# Allegro board hme-h1d03c144_evb.brd
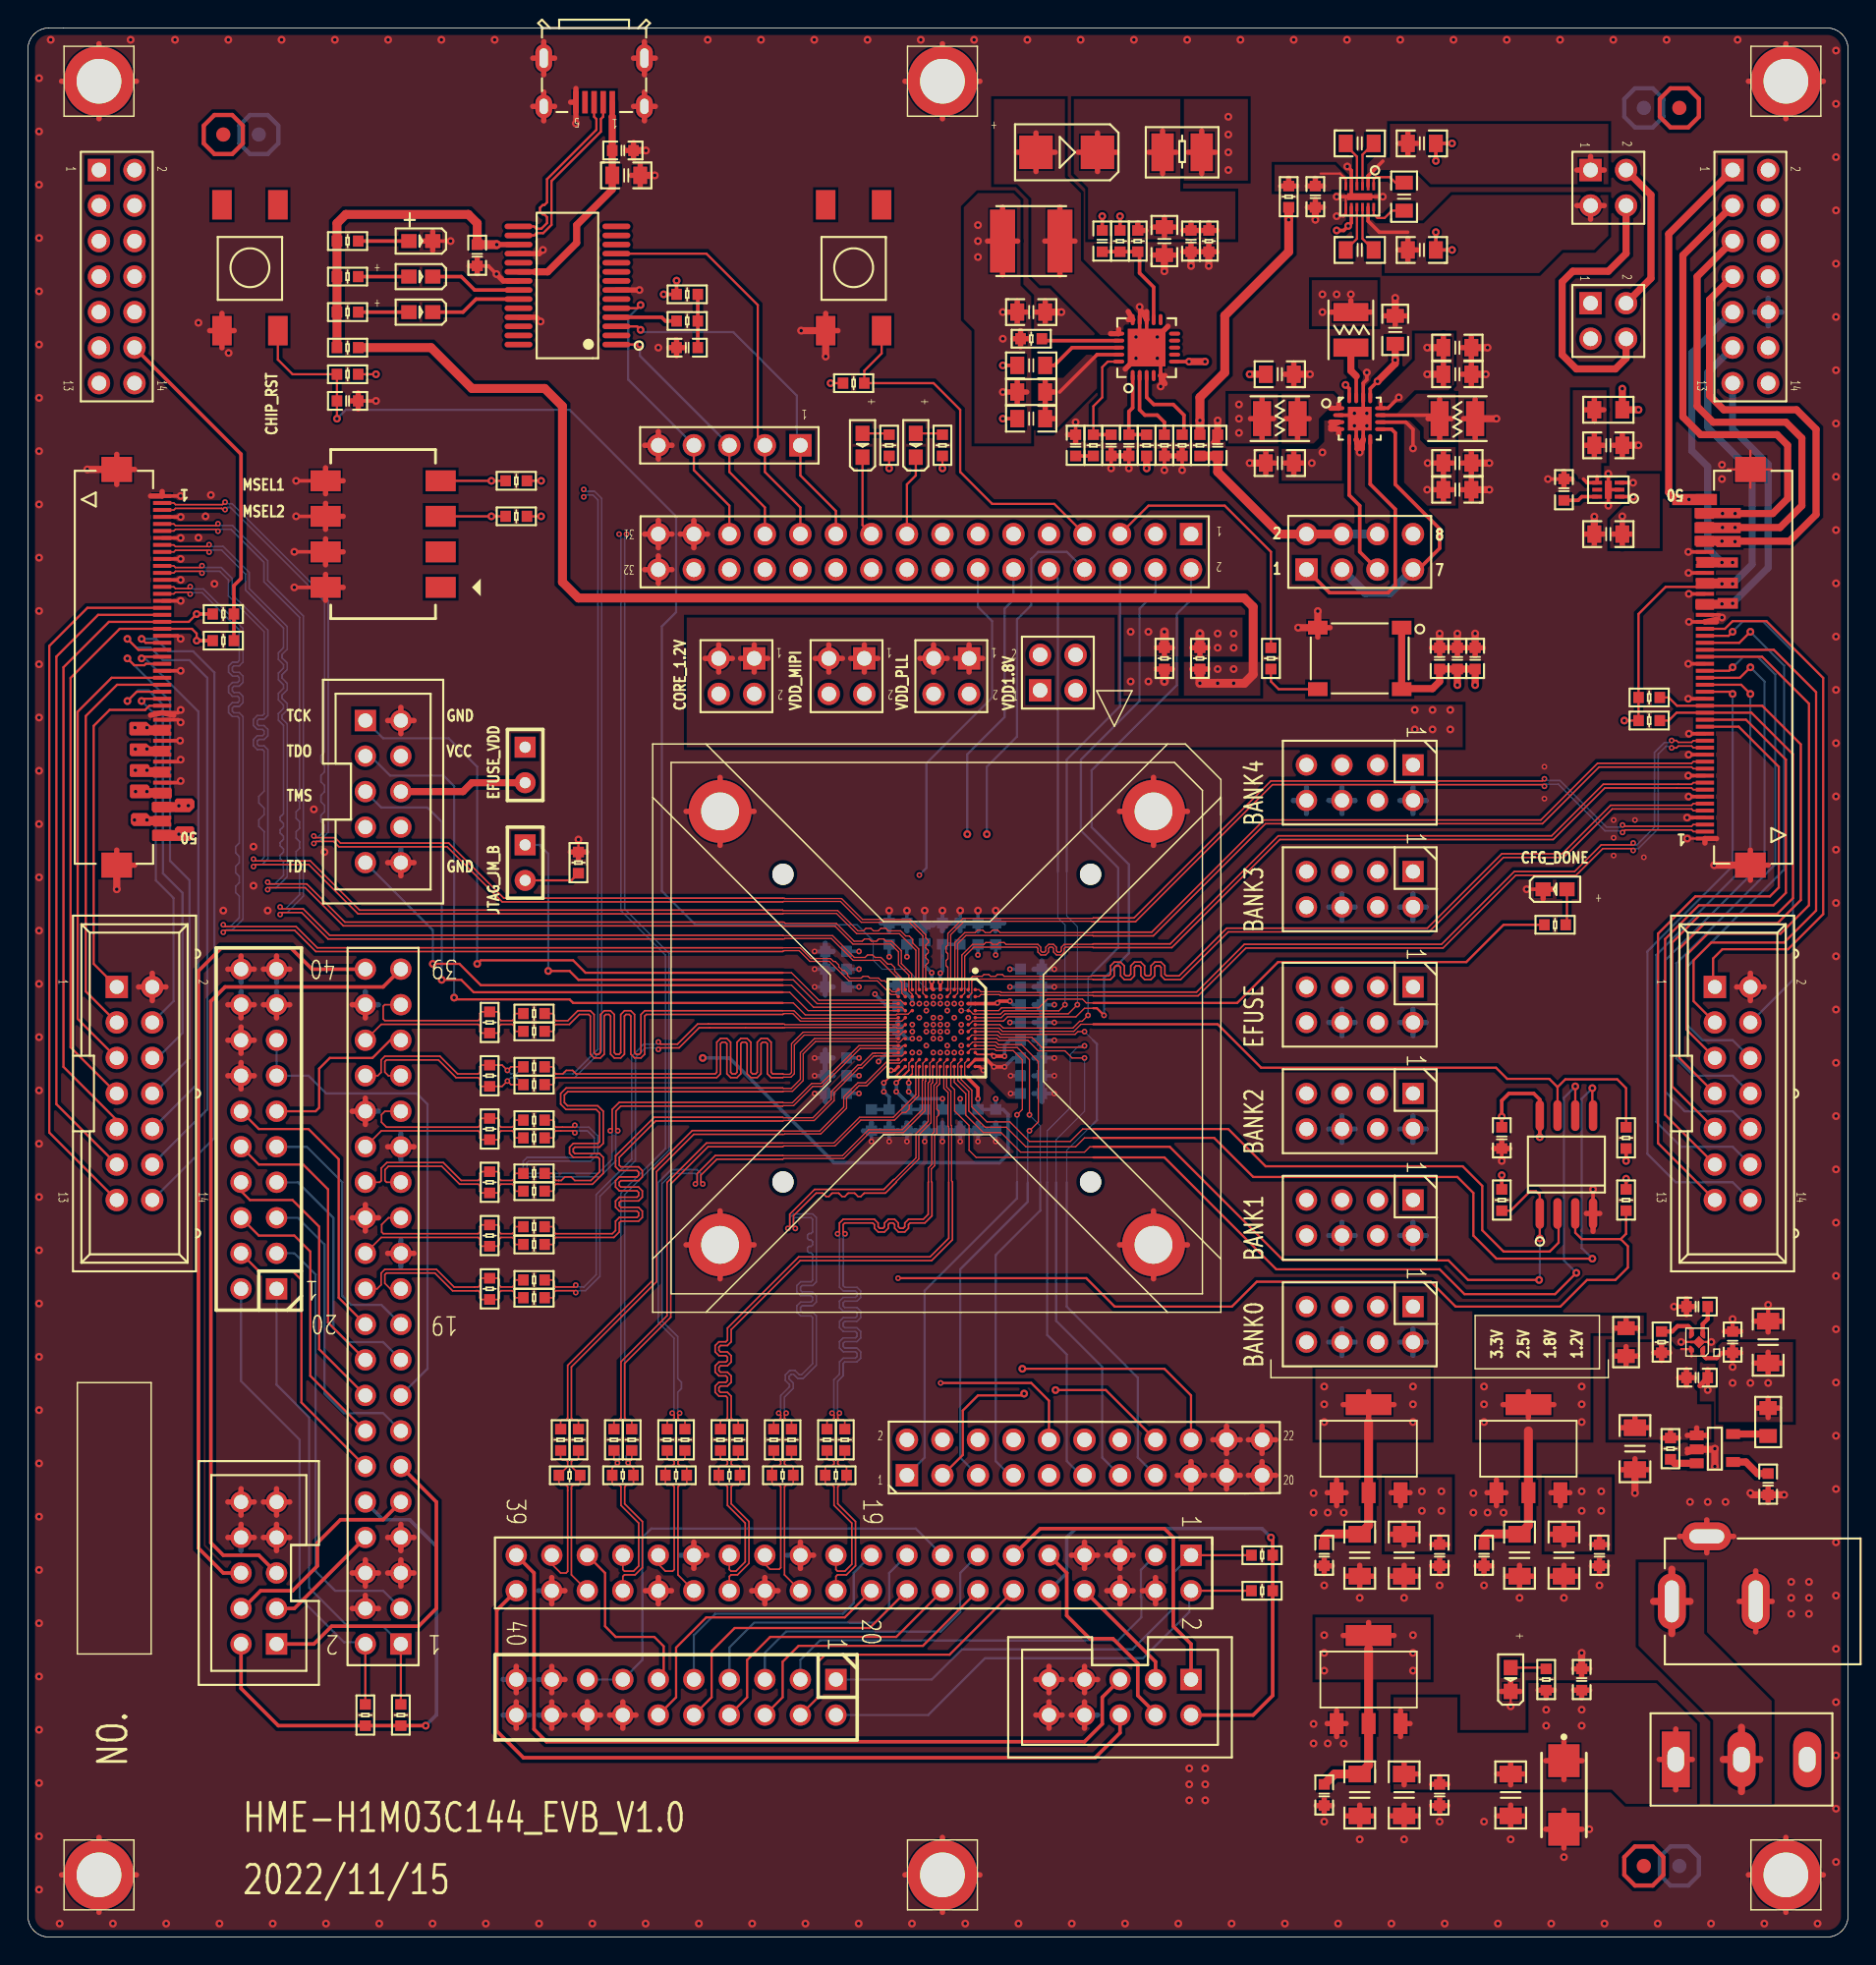
[diagram p0: board, top side]
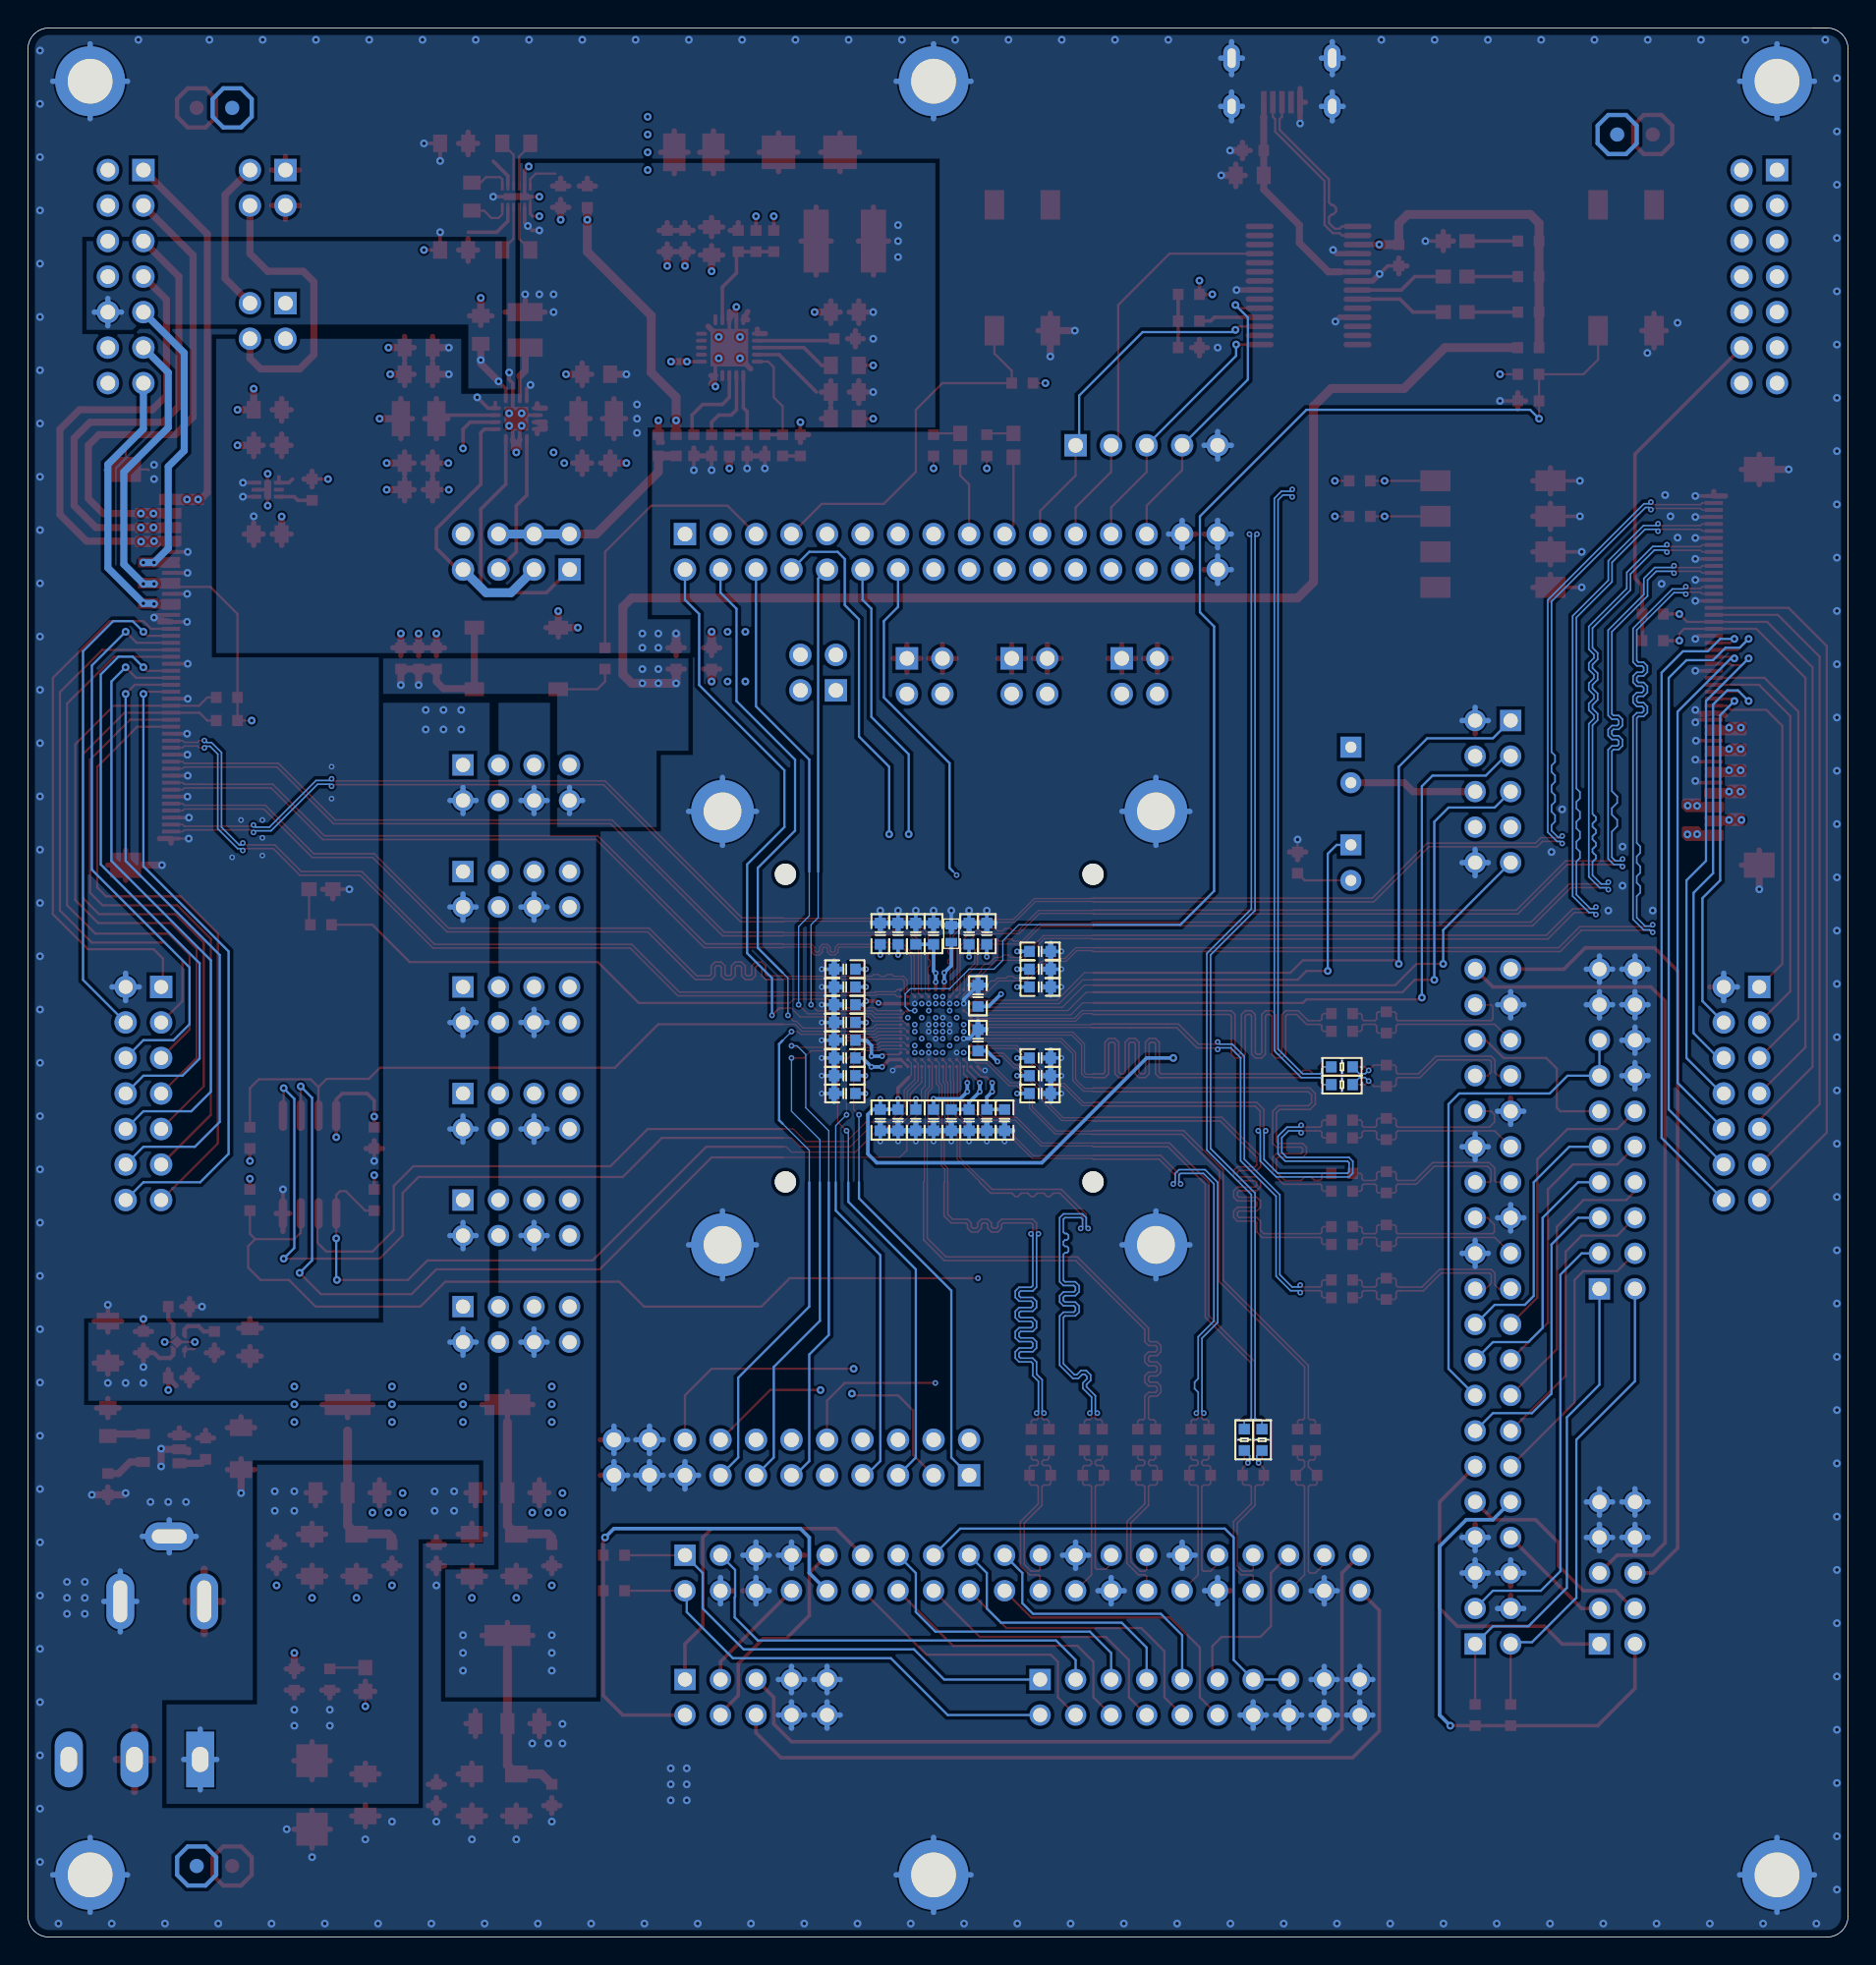
[diagram p1: board, bottom side, seen from below]

Outline 130.18 x 136.53 mm; copper layers: TOP, GND02, ART03, ART04, GND05, BOTTOM. Coordinates in mm from the lower left corner of the outline.
Outline path: 0,135.03 arc(0.44,136.09) 1.5,136.53 ; 0,135.02 arc(0.44,136.09) 1.5,136.53 ; 0,135.02 0,1.5 ; 0,135.03 0,1.5 ; 1.5,136.53 128.68,136.53 arc(129.74,136.09) 130.18,135.03 ; 1.5,136.53 2.54,136.53 ; 1.5,136.53 2.54,136.53 ; 0,1.5 arc(0.44,0.44) 1.5,0 ; 0,1.5 arc(0.44,0.44) 1.5,0 ; 1.5,0 128.67,0 arc(129.74,0.44) 130.18,1.5 ; 1.5,0 128.68,0 arc(129.74,0.44) 130.18,1.5 ; 2.54,136.53 128.67,136.53 arc(129.74,136.09) 130.18,135.02 ; 130.18,135.03 130.18,1.5 ; 130.18,135.02 130.18,1.5

## Design rules (mm)
net group @\HME-H1D03MG144_EVB\.SCHEMATIC1(SCH_1):MIPI_RX0_LP: nets MIPI_RX0_LPN MIPI_RX0_LPP
net group @\HME-H1D03MG144_EVB\.SCHEMATIC1(SCH_1):MIPI_RX1_LP: nets MIPI_RX1_LPN MIPI_RX1_LPP
net group IO15_CFDONE_4: nets IO15_CFDONE_4 N167773310
net group IO18_CLK1: nets IO18_CLK1 N3324689
net group LVDS_01N: nets LVDS_01N LVDS_01N_C
net group LVDS_01P: nets LVDS_01P LVDS_01P_C
net group LVDS_02N: nets LVDS_02N LVDS_02N_C
net group LVDS_02P: nets LVDS_02P LVDS_02P_C
net group LVDS_03N: nets LVDS_03N LVDS_03N_C
net group LVDS_03P: nets LVDS_03P LVDS_03P_C
net group LVDS_04N: nets LVDS_04N LVDS_04N_C
net group LVDS_04P: nets LVDS_04P LVDS_04P_C
net group LVDS_05N: nets LVDS_05N LVDS_05N_C
net group LVDS_05P: nets LVDS_05P LVDS_05P_C
net group LVDS_06N: nets LVDS_06N LVDS_06N_C
net group LVDS_06P: nets LVDS_06P LVDS_06P_C
net group LVDS_07N: nets LVDS_07N LVDS_07N_C
net group LVDS_07P: nets LVDS_07P LVDS_07P_C
net group LVDS_08N: nets LVDS_08N LVDS_08N_C
net group LVDS_08P: nets LVDS_08P LVDS_08P_C
net group LVDS_09N: nets LVDS_09N LVDS_09N_C
net group LVDS_09P: nets LVDS_09P LVDS_09P_C
net group LVDS_10N: nets LVDS_10N LVDS_10N_C
net group LVDS_10P: nets LVDS_10P LVDS_10P_C
net group LVDS_11N: nets LVDS_11N LVDS_11N_C
net group LVDS_11P: nets LVDS_11P LVDS_11P_C
net group LVDS_12N: nets LVDS_12N LVDS_12N_C
net group LVDS_12P: nets LVDS_12P LVDS_12P_C
net group N16733042: nets N16733042 N16733092
net group N16733096: nets N16733096 N16733100
net group N16733108: nets N16733108 N16733112
net group N16733522: nets N16733522 N16733562
net group N16733598: nets N16733598 N16733678
net group USB_DP: nets USB_DM USB_DP
net group VCC5_0: nets N167830511 VCC5_0
net group VCI: nets N16733974 VCI
net group VDDIO_12V: nets N16726004 VDDIO_12V
net group CMOS_SCL_3: nets CMOS_SCL_3 CMOS_SDA_3 LCD_IOVCC_3
net group CMOS_SCL_4: nets CMOS_SCL_4 CMOS_SDA_4 LCD_IOVCC_4
net group CRST_N: nets CRST_N MSEL0 MSEL1 N16775386 N167788470 N167788810 USER_SW0 VDDIO_AUX VDDIO_BANK4
net group FLS_CS#: nets FLS_CS# FLS_HOLD FLS_WP
net group IN_TP_SCL: nets IN_TP_SCL IN_TP_SDA IOVCC_IN
net group IOVCC_OUT: nets IOVCC_OUT OUT_TP_SCL OUT_TP_SDA
net group MIPI-IN: nets MIPIIN_CKN MIPIIN_CKP MIPIIN_D0N MIPIIN_D0P MIPIIN_D1N MIPIIN_D1P MIPIIN_D2N MIPIIN_D2P MIPIIN_D3N MIPIIN_D3P
net group MIPI-OUT: nets MIPIOUT_CKN MIPIOUT_CKP MIPIOUT_D0N MIPIOUT_D0P MIPIOUT_D1N MIPIOUT_D1P MIPIOUT_D2N MIPIOUT_D2P MIPIOUT_D3N MIPIOUT_D3P
net group P1P8V: nets N16725908 N16725940 N16725976 N16733128 N16733352 N16735413
net group PWR: nets AVDD_IN AVDD_OUT BL_A_IN BL_A_OUT BL_K_IN BL_K_OUT ELVDD/VSP_IN ELVDD_OUT ELVSS/VSN_IN ELVSS_OUT USB_5V VCI_IN VCI_OUT
net group VDDIO_33V: nets N16733674 N16733880 N16734108 N16735597 N16735621 N16775166 N16775518 N16775522 P3P3V USB_3P3V VDDIO_33V

## Placement (name value [footprint] x y rotation side)
C1  0.1uF  [C0603]  22.86 109.86 0 top
C2  2.2uF  [C0603]  103.5 91.44 90 top
C3  0.1uF  [C0603]  102.23 91.44 90 top
C4  10nF  [C0603]  100.97 91.44 90 top
C5  0.1uF  [C0603]  61.59 58.42 270 bottom
C6  0.1uF  [C0603]  71.75 60.33 0 bottom
C7  2.2uF  [C0603]  60.33 58.42 270 bottom
C8  0.1uF  [C0603]  69.22 71.75 90 bottom
C10  2.2uF  [C0603]  67.94 71.75 90 bottom
C11  0.1uF  [C0603]  71.75 61.59 0 bottom
C12  2.2uF  [C0603]  71.75 62.87 0 bottom
C13  0.1uF  [C0603]  62.87 71.75 90 bottom
C15  2.2uF  [C0603]  61.59 71.75 90 bottom
C16  0.1uF  [C0603]  65.41 71.75 90 bottom
C18  2.2uF  [C0603]  66.67 71.75 90 bottom
C19  0.1uF  [C0603]  66.67 58.42 270 bottom
C21  2.2uF  [C0603]  65.41 58.42 270 bottom
C22  2.2uF  [C0603]  67.94 58.42 270 bottom
C23  0.1uF  [C0603]  69.22 58.42 270 bottom
C24  0.1uF  [C0603]  62.23 67.31 90 bottom
C25  0.1uF  [C0603]  57.78 61.59 180 bottom
C26  2.2uF  [C0603]  57.78 60.33 180 bottom
C27  0.1uF  [C0603]  57.78 67.94 180 bottom
C28  2.2uF  [C0603]  62.23 64.14 90 bottom
C33  220uF/10V  [C6032]  109.86 10.16 270 top
C34  10uF/16v  [C1206]  106.05 10.16 270 top
C35  10uF/16v  [C1206]  98.42 27.3 270 top
C36  10uF/16v  [C1206]  95.25 27.3 270 top
C37  0.1uF  [C0603]  111.12 18.41 90 top
C38  0.1uF  [C0603]  100.97 27.3 270 top
C39  0.1uF  [C0603]  92.71 27.3 270 top
C44  10uF/16v  [C1206]  109.86 27.3 270 top
C45  0.1uF  [C0603]  112.39 27.3 270 top
C46  10uF/16v  [C1206]  106.68 27.3 270 top
C47  0.1uF  [C0603]  104.14 27.3 270 top
C48  0.1uF  [C0603]  83.19 121.28 270 top
C49  4.7uF  [C0805]  81.28 121.28 90 top
C50  47pF  [C0603]  76.83 121.28 90 top
C51  1uF  [C0805]  71.75 112.39 180 top
C52  22nF  [C0603]  77.47 106.68 270 top
C53  22nF  [C0603]  74.93 106.68 90 top
C54  10uF/16v  [C1206]  114.94 34.92 270 top
C55  0.1uF  [C0603]  119.38 40.01 0 top
C56  10uF/16v  [C1206]  124.46 42.55 90 top
C57  0.1uF  [C0603]  121.92 42.55 90 top
C58  0.1uF  [C0603]  119.38 45.09 180 top
C59  10uF/16v  [C1206]  98.42 10.16 270 top
C60  0.1uF  [C0603]  100.97 10.16 270 top
C61  10uF/16v  [C1206]  95.25 10.16 270 top
C62  0.1uF  [C0603]  92.71 10.16 270 top
C63  10uF  [C0805]  89.53 105.41 0 top
C64  10uF  [C0805]  97.79 114.94 270 top
C65  10uF  [C0805]  102.23 103.5 180 top
C66  10uF  [C0805]  102.23 105.41 180 top
C67  10nF  [C0603]  124.46 32.38 270 top
C68  0.1uF  [C0603]  105.41 57.15 90 top
C69  0.1uF  [C0603]  92.08 124.46 270 top
C70  10nF  [C0603]  109.86 103.5 270 top
C71  1uF  [C0805]  98.42 124.46 90 top
C72  1uF  [C0805]  95.25 128.27 0 top
C73  1uF  [C0805]  95.25 120.65 0 top
C74  0.1uF  [C0603]  78.74 106.68 270 top
C75  2.2uF  [C0805]  99.69 128.27 180 top
C76  2.2uF  [C0805]  99.69 120.65 180 top
C77  10uF  [C0805]  113.03 100.33 180 top
C78  10uF  [C0805]  113.03 106.68 0 top
C79  22uF  [C0805]  71.75 116.2 0 top
C80  10uF  [C0805]  71.75 108.58 0 top
C81  0.1uF  [C0603]  85.09 106.68 90 top
C82  10uF  [C0805]  102.23 113.67 180 top
C83  10uF  [C0805]  89.53 111.76 180 top
C84  10uF  [C0805]  102.23 111.76 180 top
C85  2.2uF  [C0603]  62.87 58.42 270 bottom
C86  0.1uF  [C0603]  64.14 58.42 270 bottom
C87  0.1uF  [C0603]  71.75 66.67 0 bottom
C88  2.2uF  [C0603]  71.75 67.94 0 bottom
C89  0.1uF  [C0603]  71.75 69.22 0 bottom
C90  0.1uF  [C0603]  57.78 70.48 180 bottom
C91  0.1uF  [C0603]  57.78 69.22 180 bottom
C92  0.1uF  [C0603]  57.78 62.87 180 bottom
C93  2.2uF  [C0603]  71.75 65.41 0 bottom
C94  0.1uF  [C0603]  71.75 64.14 0 bottom
C99  0.1uF  [C0603]  47.15 113.67 180 top
C100  0.1uF  [C0603]  32.13 120.27 90 top
C101  0.1uF  [C0603]  42.55 127.76 0 top
C102  10uF  [C0805]  42.79 125.98 0 top
D3  LED_RED  [LED0603]  106.05 18.41 270 top
D4  -  [SS24]  74.3 127.64 0 top
D5  LED  [LED0603]  109.22 74.93 180 top
D6  LED  [LED0603]  63.5 106.68 270 top
D7  LED  [LED0603]  59.69 106.68 270 top
D8  LED  [LED0603]  28.1 116.2 0 top
D9  LED  [LED0603]  28.1 118.75 0 top
F3  FUSE 100mA  [R1210]  82.55 127.64 0 top
F11  100Mhz@70ohm  [L0603]  64.14 71.75 270 bottom
FF1  FH12-50S-0.5SH(55)  [FH12-50S-05SH]  123.19 90.81 90 top
FF2  FH12-50S-0.5SH(55)  [FH12-50S-05SH]  6.35 90.81 270 top
GH1  NC  [HOLE_5R3_2]  5.08 132.72 0 top
GH2  NC  [HOLE_5R3_2]  5.08 4.45 0 top
GH3  NC  [HOLE_5R3_2]  125.73 4.45 0 top
GH4  NC  [HOLE_5R3_2]  65.41 132.72 0 top
GH5  NC  [HOLE_5R3_2]  65.41 4.45 0 top
GH6  NC  [HOLE_5R3_2]  125.73 132.72 0 top
IC1  FT232RL_REEL  [SOP65P778X200-28N]  38.59 118.11 90 top
J2  JTAG  [HDR254M-2X5]  25.4 81.92 0 top
J8  -  [JUMPER4]  91.44 97.79 0 top
J9  30320-6002HB  [CON20D_254_DIP]  16.51 57.78 180 top
J10  CONN EDGE 20X2  [CON40_254]  25.4 45.09 180 top
J11  DC3_10  [HDR254M-2X5]  16.51 26.04 180 top
J12  30320-6002HB  [CON20D_254_DIP]  46.35 17.14 270 top
J13  CONN EDGE 20X2  [CON40_254]  59.05 26.04 270 top
J14  DC3_10  [HDR254M-2X5]  78.11 17.14 270 top
J15  PLUG POWER FEMALE  [DC005]  123.57 24 180 top
J17  -  [JUMPER7]  121.92 126.36 270 top
J18  -  [CON14A]  7.62 60.33 270 top
J19  -  [JUMPER7]  5.08 126.36 270 top
J20  -  [CON14A]  121.92 60.33 270 top
J22  HEADER 11X2  [CON22A]  62.87 33.02 0 top
J24  MICRO USB  [USB_AB]  40.49 134.37 180 top
J25  -  [CON5]  55.24 106.68 180 top
J26  HEADER 16X2  [CON32A]  83.19 100.33 180 top
JP1  VPP  [CON2S_254_DIP]  35.56 76.83 270 top
JP2  CON8A  [CON8D_254_DIP]  95.25 82.55 270 top
JP3  CON8A  [CON8D_254_DIP]  95.25 74.93 270 top
JP4  CON8A  [CON8D_254_DIP]  95.25 43.81 270 top
JP5  CON8A  [CON8D_254_DIP]  95.25 59.05 270 top
JP7  -  [JUMPER2]  59.82 91.44 180 top
JP8  -  [JUMPER2]  67.31 91.44 180 top
JP9  -  [JUMPER2]  51.94 91.44 180 top
JP10  VPP  [CON2S_254_DIP]  35.56 83.82 270 top
JP11  -  [JUMPER2]  111.76 126.36 270 top
JP12  -  [JUMPER2]  111.76 116.84 270 top
JP13  CON8A  [CON8D_254_DIP]  95.25 66.67 270 top
JP14  -  [JUMPER2]  72.39 89.15 0 top
JP15  CON8A  [CON8D_254_DIP]  95.25 51.44 270 top
L5  33uH  [IND5020]  71.75 121.28 0 top
L6  4.7uH  [L2520M]  89.53 108.58 0 top
L7  4.7uH  [L2520M]  102.23 108.58 180 top
L8  10uH  [L2520M]  94.61 114.94 270 top
LED6  RED  [LED0603]  28.1 121.28 0 top
NOREF  -  [unnamed]  13.97 128.91 0 top
NOREF#2  -  [unnamed]  115.57 5.08 0 top
NOREF#3  -  [unnamed]  118.11 130.81 0 top
NOREF#4  -  [unnamed]  115.57 130.81 180 bottom
NOREF#5  -  [unnamed]  118.11 5.08 180 bottom
NOREF#6  -  [unnamed]  16.51 128.91 180 bottom
R1  510R  [R0603]  109.22 72.39 180 top
R2  10K  [R0603]  39.37 76.83 270 top
R3  33K  [R0603]  22.86 111.76 0 top
R4  33  [R0603]  88.9 91.44 270 top
R7  10K  [R0603]  34.92 101.6 0 top
R8  10K  [R0603]  34.92 104.14 0 top
R9  510R  [R0603]  65.41 106.68 270 top
R14  4.7K  [R0603]  26.67 15.88 270 top
R15  4.7K  [R0603]  24.13 15.88 270 top
R16  0R  [R0603]  36.2 62.23 0 top
R17  0R  [R0603]  45.72 35.56 90 top
R18  0R  [R0603]  36.2 60.96 0 top
R19  0R  [R0603]  46.99 35.56 90 top
R20  0R  [R0603]  36.2 54.61 0 top
R21  0R  [R0603]  53.34 35.56 90 top
R22  0R  [R0603]  36.2 53.34 0 top
R23  0R  [R0603]  54.61 35.56 90 top
R24  0R  [R0603]  36.2 58.42 0 top
R25  0R  [R0603]  58.42 35.56 90 top
R26  50R  [R0603]  36.2 60.96 0 bottom
R27  50R  [R0603]  36.2 62.23 180 bottom
R28  0R  [R0603]  36.2 57.15 0 top
R29  0R  [R0603]  57.15 35.56 90 top
R30  0R  [R0603]  36.2 50.8 0 top
R31  0R  [R0603]  50.8 35.56 90 top
R32  0R  [R0603]  36.2 49.53 0 top
R33  0R  [R0603]  49.53 35.56 90 top
R34  0R  [R0603]  38.1 35.56 90 top
R35  0R  [R0603]  43.18 35.56 90 top
R36  0R  [R0603]  39.37 35.56 90 top
R37  0R  [R0603]  41.91 35.56 90 top
R38  4.7K  [R0603]  88.27 27.3 0 top
R39  4.7K  [R0603]  88.27 24.77 0 top
R40  50R  [R0603]  41.91 35.56 90 bottom
R41  50R  [R0603]  43.18 35.56 270 bottom
R43  510R  [R0603]  108.58 18.41 90 top
R46  2R  [R0805]  71.75 110.49 0 top
R47  10k  [R0603]  71.75 114.3 0 top
R48  560k  [R0603]  79.38 121.28 270 top
R49  75k  [R0603]  84.45 121.28 90 top
R50  10k  [R0603]  80.01 106.68 90 top
R51  21.5k  [R0603]  78.11 121.28 90 top
R52  5.1k  [R0603]  76.2 106.68 270 top
R53  49.9k  [R0603]  82.55 106.68 270 top
R54  0R/NC  [R0603]  81.28 106.68 270 top
R55  0R  [R0805]  113.03 109.22 0 top
R56  0  [R0805]  114.3 42.55 270 top
R57  100K  [R0603]  116.84 42.55 270 top
R60  NC  [R0603]  33.02 61.59 90 top
R61  NC  [R0603]  33.02 53.98 90 top
R62  NC  [R0603]  33.02 57.78 90 top
R63  NC  [R0603]  33.02 50.16 90 top
R64  NC  [R0603]  38.73 33.02 180 top
R65  NC  [R0603]  46.35 33.02 180 top
R66  NC  [R0603]  53.98 33.02 180 top
R67  NC  [R0603]  57.78 33.02 0 top
R68  NC  [R0603]  50.16 33.02 0 top
R69  NC  [R0603]  42.55 33.02 0 top
R70  10K  [R0603]  59.05 111.12 180 top
R71  100K  [R0603]  117.47 34.92 90 top
R72  0  [R0805]  124.46 36.83 90 top
R73  NC  [R0603]  33.02 46.35 90 top
R74  0R  [R0603]  36.2 46.99 0 top
R75  0R  [R0603]  36.2 45.72 0 top
R76  NC  [R0603]  33.02 65.41 90 top
R77  0R  [R0603]  36.2 66.04 0 top
R78  0R  [R0603]  36.2 64.77 0 top
R79  4.7k  [R0603]  105.41 52.7 270 top
R80  4.7k  [R0603]  114.3 57.15 90 top
R81  4.7k  [R0603]  114.3 52.7 270 top
R82  2.2k  [R0603]  115.95 88.65 0 top
R83  2.2k  [R0603]  115.95 87 0 top
R84  2.2k  [R0603]  13.97 92.71 180 top
R85  2.2k  [R0603]  13.97 94.61 180 top
R86  4.7k  [R0603]  90.17 124.46 90 top
R87  4.7k  [R0603]  83.82 106.68 90 top
R90  510R  [R0603]  61.59 106.68 270 top
R91  1K  [R0603]  22.86 121.28 0 top
R92  0R  [R0603]  47.15 115.57 0 top
R93  1K  [R0603]  22.86 118.75 180 top
R94  1K  [R0603]  22.86 116.2 180 top
R95  0R  [R0603]  81.28 91.44 270 top
R96  0R  [R0603]  83.82 91.44 270 top
R97  0R  [R0603]  47.15 117.47 180 top
R98  0R  [R0603]  22.86 113.67 0 top
SW2  SW DIP-4  [SW_SDA_8P]  25.4 100.33 180 top
SW3  SW KEY-Y1011  [SWCS12]  122.56 12.7 0 top
SW5  SW PUSHBUTTON-SPST-2  [SW_BUT_SMD]  15.88 119.38 270 top
SW6  SW PUSHBUTTON-SPST-2  [SW_BUT_SMD]  59.05 119.38 270 top
U2  SG8002D_20M  [SMT7X5]  95.25 91.44 180 top
U4  LM1117-3.3  [SOT-223]  95.89 34.92 0 top
U5  LM1117-1.8  [SOT-223]  107.31 34.92 0 top
U6  RT8543  [WQFN-20L]  80.01 113.67 90 top
U7  SGM2038-1.2  [UTDFN-12X12-4L]  119.38 42.55 90 top
U8  LM1117-2.5  [SOT-223]  95.89 18.41 0 top
U9  SGM2036-1.2  [SOT-23-5]  120.65 34.92 270 top
U10  HME-H1D03_MG144  [BGA-MG144-SOCKET]  65 65 270 top
U11  W25Q64  [SOP8]  110.03 55.24 0 top
U13  NT50198  [TDFN12]  95.25 124.46 270 top
U14  SGM2035C-3.0YUDN6G/TR  [SGM2035-UTDFN6]  113.03 103.5 90 top
U15  SGM3851AYTQ16G/TR  [TQFN-3X3-16L]  95.25 108.58 0 top

## Library data of the parts
C1 C3 C5 C6 C8 C11 C13 C16 C19 C23-C25 C27 C37-C39 C45 C47 C55 C57 C58 C60 C62 C86 C87 C89-C92 C94 = CAP NP: Tolerance: tol*; signal model: DEFAULT_CAPACITOR_100000pF_2_1
C2 = CAP NP: Tolerance: tol*; signal model: DEFAULT_CAPACITOR_2.2e+06pF_2_1
C4 C67 = CAP NP: Tolerance: tol*; signal model: DEFAULT_CAPACITOR_10000pF_2_1
C7 C10 C12 C15 C18 C21 C22 C26 C28 C85 C88 C93 = CAPACITOR POL: Tolerance: tol*; signal model: DEFAULT_CAPACITOR_2.2e+06pF_2_1; room: lm+3.3v
C33 = CAPACITOR POL: signal model: DEFAULT_CAPACITOR_2.2e+08pF_2_1
C34-C36 C44 C46 C54 C56 C59 C61 = CAPACITOR POL: Tolerance: tol*; signal model: DEFAULT_CAPACITOR_1e+07pF_2_1; room: lm+3.3v
C48 C68 C69 C74 C81 C99-C101 = CAP_NP_0603: Tolerance: tol*; signal model: DEFAULT_CAPACITOR_100000pF_2_1
C49 = CAP_NP_0805: Tolerance: tol*; signal model: DEFAULT_CAPACITOR_4.7e+06pF_2_1
C50 = CAP_NP_0603: Tolerance: tol*; signal model: DEFAULT_CAPACITOR_47.000000pF_2_1
C51 C71-C73 = CAP_NP_0805: Tolerance: tol*; signal model: DEFAULT_CAPACITOR_1e+06pF_2_1
C52 C53 = CAP_NP_0603: Tolerance: tol*; signal model: DEFAULT_CAPACITOR_22000pF_2_1
C63-C66 C77 C78 C80 C82-C84 C102 = CAP_NP_0805: Tolerance: tol*; signal model: DEFAULT_CAPACITOR_1e+07pF_2_1
C70 = CAP_NP_0603: Tolerance: tol*; signal model: DEFAULT_CAPACITOR_10000pF_2_1
C75 C76 = CAP_NP_0805: Tolerance: tol*; signal model: DEFAULT_CAPACITOR_2.2e+06pF_2_1
C79 = CAP_NP_0805: Tolerance: tol*; signal model: DEFAULT_CAPACITOR_2.2e+07pF_2_1
D3 = LED_0
D4 = BYT3400B/DD_0
D5-D9 LED6 = LED
F3 = FUSE: Tolerance: tol*
F11 = FERRITE_F: Tolerance: RichardLC; User Part Number: pn
FF1 FF2 = hme_mipi_dphy_con
GH1-GH6 = T POINT R
IC1 = FT232RL_REEL
J2 J11 J14 = HEADER 5X2
J8 = JUMPER4
J9 J12 = CON20A
J10 J13 = CONN EDGE 28X2_0
J15 = PLUG AC FEMALE
J17 J19 = JUMPER7
J18 J20 = CON14A
J22 = HEADER 11X2
J24 = USB Micro AB_0
J25 = CON5
J26 = HEADER 16X2
JP1 JP10 = JUMPER
JP2-JP5 JP13 JP15 = CON8A
JP7-JP9 JP11 JP12 JP14 = JUMPER2
L5 = CHOKE TORROID-IRON: signal model: DEFAULT_INDUCTOR_33000nH_2_1
L6 L7 = power_INDUCTOR: Tolerance: tol*; signal model: DEFAULT_INDUCTOR_4700nH_2_1
L8 = power_INDUCTOR: Tolerance: tol*; signal model: DEFAULT_INDUCTOR_10000nH_2_1
R1 R9 R43 R90 = R: Tolerance: tol*; signal model: DEFAULT_RESISTOR_510.000000OHM_2_1
R2 R7 R8 R70 = R: Tolerance: tol*; signal model: DEFAULT_RESISTOR_10000OHM_2_1
R3 = R: Tolerance: tol*; signal model: DEFAULT_RESISTOR_33000OHM_2_1
R4 = R: Tolerance: tol*; signal model: DEFAULT_RESISTOR_33.000000OHM_2_1
R14 R15 R38 R39 = R: Tolerance: tol*; signal model: DEFAULT_RESISTOR_4700OHM_2_1
R16-R25 R28-R37 R74 R75 R77 R78 = R: Tolerance: tol*; signal model: DEFAULT_RESISTOR_0.001OHM_2_1
R26 R27 R40 R41 R60-R69 R73 R76 = R: Tolerance: tol*
R46 = RESISTOR_0805: Tolerance: tol*; signal model: DEFAULT_RESISTOR_2.000000OHM_2_1
R47 R50 = RESISTOR_0603: Tolerance: tol*; signal model: DEFAULT_RESISTOR_10000OHM_2_1
R48 = RESISTOR_0603: Tolerance: tol*; signal model: DEFAULT_RESISTOR_560000OHM_2_1
R49 = RESISTOR_0603: Tolerance: tol*; signal model: DEFAULT_RESISTOR_75000OHM_2_1
R51 = RESISTOR_0603: Tolerance: tol*; signal model: DEFAULT_RESISTOR_21500OHM_2_1
R52 = RESISTOR_0603: Tolerance: tol*; signal model: DEFAULT_RESISTOR_5100OHM_2_1
R53 = RESISTOR_0603: Tolerance: tol*; signal model: DEFAULT_RESISTOR_49900OHM_2_1
R54 R92 R95-R98 = RESISTOR_0603: Tolerance: tol*; signal model: DEFAULT_RESISTOR_0.001OHM_2_1
R55 = RESISTOR_0805: Tolerance: tol*; signal model: DEFAULT_RESISTOR_0.001OHM_2_1
R56 R72 = R_0: Tolerance: tol*; signal model: DEFAULT_RESISTOR_0.001OHM_2_1
R57 R71 = R: Tolerance: tol*; signal model: DEFAULT_RESISTOR_100000OHM_2_1
R79-R81 R86 R87 = RESISTOR_0603: Tolerance: tol*; signal model: DEFAULT_RESISTOR_4700OHM_2_1
R82-R85 = RESISTOR_0603: Tolerance: tol*; signal model: DEFAULT_RESISTOR_2200OHM_2_1
R91 R93 R94 = RESISTOR_0603: Tolerance: tol*; signal model: DEFAULT_RESISTOR_1000.000000OHM_2_1
SW2 = SW DIP-4
SW3 = SW KEY-Y1011_1
SW5 SW6 = SW PUSHBUTTON-SPST-2
U2 = SG8002D_0
U4 U5 U8 = LM117_2
U6 = RT8543
U7 = SGM2036-1_1.2
U9 = SGM2036-1.2
U10 = HME-H1D03_MG144_1
U11 = GD25WQ64
U13 = NT50198
U14 = SGM2035C
U15 = SGM3833B

## Footprints (pads in the part's own frame, mm; a bottom-side part is the same pattern mirrored in y, then rotated)
BGA-MG144-SOCKET
  round 1.524 hole 1.524 unplated: (-11,11) (-11,-11) (11,11) (11,-11)
  round 4.5 hole 2.7: 1(-15.5,-15.5) 2(15.5,-15.5) 3(15.5,15.5) 4(-15.5,15.5)
  round 0.25 smd: A1(-2.75,2.75) A2(-2.25,2.75) A3(-1.75,2.75) A4(-1.25,2.75) A5(-0.75,2.75) A6(-0.25,2.75) A7(0.25,2.75) A8(0.75,2.75) A9(1.25,2.75) A10(1.75,2.75) A11(2.25,2.75) A12(2.75,2.75) B1(-2.75,2.25) B2(-2.25,2.25) B3(-1.75,2.25) B4(-1.25,2.25) B5(-0.75,2.25) B6(-0.25,2.25) B7(0.25,2.25) B8(0.75,2.25) B9(1.25,2.25) B10(1.75,2.25) B11(2.25,2.25) B12(2.75,2.25) C1(-2.75,1.75) C2(-2.25,1.75) C3(-1.75,1.75) C4(-1.25,1.75) C6(-0.25,1.75) C7(0.25,1.75) C9(1.25,1.75) C10(1.75,1.75) C11(2.25,1.75) C12(2.75,1.75) D1(-2.75,1.25) D2(-2.25,1.25) D3(-1.75,1.25) D5(-0.75,1.25) D8(0.75,1.25) D10(1.75,1.25) D11(2.25,1.25) D12(2.75,1.25) E1(-2.75,0.75) E2(-2.25,0.75) E3(-1.75,0.75) E4(-1.25,0.75) E6(-0.25,0.75) E7(0.25,0.75) E9(1.25,0.75) E10(1.75,0.75) E11(2.25,0.75) E12(2.75,0.75) F1(-2.75,0.25) F2(-2.25,0.25) F3(-1.75,0.25) F5(-0.75,0.25) F6(-0.25,0.25) F7(0.25,0.25) F8(0.75,0.25) F10(1.75,0.25) F11(2.25,0.25) F12(2.75,0.25) G1(-2.75,-0.25) G2(-2.25,-0.25) G3(-1.75,-0.25) G5(-0.75,-0.25) G6(-0.25,-0.25) G7(0.25,-0.25) G8(0.75,-0.25) G10(1.75,-0.25) G11(2.25,-0.25) G12(2.75,-0.25) H1(-2.75,-0.75) H2(-2.25,-0.75) H3(-1.75,-0.75) H4(-1.25,-0.75) H6(-0.25,-0.75) H7(0.25,-0.75) H9(1.25,-0.75) H11(2.25,-0.75) H12(2.75,-0.75) J1(-2.75,-1.25) J2(-2.25,-1.25) J3(-1.75,-1.25) J5(-0.75,-1.25) J8(0.75,-1.25) J10(1.75,-1.25) J11(2.25,-1.25) J12(2.75,-1.25) K1(-2.75,-1.75) K2(-2.25,-1.75) K3(-1.75,-1.75) K4(-1.25,-1.75) K6(-0.25,-1.75) K7(0.25,-1.75) K8(0.75,-1.75) K10(1.75,-1.75) K11(2.25,-1.75) K12(2.75,-1.75) L1(-2.75,-2.25) L2(-2.25,-2.25) L3(-1.75,-2.25) L4(-1.25,-2.25) L5(-0.75,-2.25) L6(-0.25,-2.25) L7(0.25,-2.25) L8(0.75,-2.25) L9(1.25,-2.25) L10(1.75,-2.25) L11(2.25,-2.25) L12(2.75,-2.25) M1(-2.75,-2.75) M2(-2.25,-2.75) M3(-1.75,-2.75) M4(-1.25,-2.75) M5(-0.75,-2.75) M6(-0.25,-2.75) M7(0.25,-2.75) M8(0.75,-2.75) M9(1.25,-2.75) M10(1.75,-2.75) M11(2.25,-2.75) M12(2.75,-2.75)
C0603
  rect 0.76x0.8 smd: 1(-0.76,0) 2(0.76,0)
C0805
  rect 1x1.25 smd: 1(-1,0) 2(1,0)
C1206
  rect 1.2x1.6 smd: 1(-1.5,0) 2(1.5,0)
C6032
  rect 2.35x2.25 smd: 1(-2.45,0) 2(2.45,0)
CON2S_254_DIP
  rect 1.5x1.5 hole 0.8: 1(-1.27,0)
  round 1.501 hole 0.79: 2(1.27,0)
CON5
  rect 1.6x1.6 hole 1.05: 1(0,0)
  round 1.6 hole 1.05: 2(2.54,0) 3(5.08,0) 4(7.62,0) 5(10.16,0)
CON8D_254_DIP
  rect 1.524x1.524 hole 1.016: 1(-1.27,3.81)
  round 1.524 hole 1.016: 2(1.27,3.81) 3(-1.27,1.27) 4(1.27,1.27) 5(-1.27,-1.27) 6(1.27,-1.27) 7(-1.27,-3.81) 8(1.27,-3.81)
CON14A
  rect 1.6x1.6 hole 1: 1(-7.62,-1.27)
  round 1.6 hole 1: 2(-7.62,1.27) 3(-5.08,-1.27) 4(-5.08,1.27) 5(-2.54,-1.27) 6(-2.54,1.27) 7(0,-1.27) 8(0,1.27) 9(2.54,-1.27) 10(2.54,1.27) 11(5.08,-1.27) 12(5.08,1.27) 13(7.62,-1.27) 14(7.62,1.27)
CON20D_254_DIP
  rect 1.524x1.524 hole 1.016: 1(-1.27,11.43)
  round 1.524 hole 1.016: 2(1.27,11.43) 3(-1.27,8.89) 4(1.27,8.89) 5(-1.27,6.35) 6(1.27,6.35) 7(-1.27,3.81) 8(1.27,3.81) 9(-1.27,1.27) 10(1.27,1.27) 11(-1.27,-1.27) 12(1.27,-1.27) 13(-1.27,-3.81) 14(1.27,-3.81) 15(-1.27,-6.35) 16(1.27,-6.35) 17(-1.27,-8.89) 18(1.27,-8.89) 19(-1.27,-11.43) 20(1.27,-11.43)
CON22A
  rect 1.6x1.6 hole 1.05: 1(0,0)
  round 1.6 hole 1.05: 2(0,2.54) 3(2.54,0) 4(2.54,2.54) 5(5.08,0) 6(5.08,2.54) 7(7.62,0) 8(7.62,2.54) 9(10.16,0) 10(10.16,2.54) 11(12.7,0) 12(12.7,2.54) 13(15.24,0) 14(15.24,2.54) 15(17.78,0) 16(17.78,2.54) 17(20.32,0) 18(20.32,2.54) 19(22.86,0) 20(22.86,2.54) 21(25.4,0) 22(25.4,2.54)
CON32A
  rect 1.6x1.6 hole 1.05: 1(0,0)
  round 1.6 hole 1.05: 2(0,2.54) 3(2.54,0) 4(2.54,2.54) 5(5.08,0) 6(5.08,2.54) 7(7.62,0) 8(7.62,2.54) 9(10.16,0) 10(10.16,2.54) 11(12.7,0) 12(12.7,2.54) 13(15.24,0) 14(15.24,2.54) 15(17.78,0) 16(17.78,2.54) 17(20.32,0) 18(20.32,2.54) 19(22.86,0) 20(22.86,2.54) 21(25.4,0) 22(25.4,2.54) 23(27.94,0) 24(27.94,2.54) 25(30.48,0) 26(30.48,2.54) 27(33.02,0) 28(33.02,2.54) 29(35.56,0) 30(35.56,2.54) 31(38.1,0) 32(38.1,2.54)
CON40_254
  rect 1.524x1.524 hole 1.016: 1(-1.27,24.13)
  round 1.524 hole 1.016: 2(1.27,24.13) 3(-1.27,21.59) 4(1.27,21.59) 5(-1.27,19.05) 6(1.27,19.05) 7(-1.27,16.51) 8(1.27,16.51) 9(-1.27,13.97) 10(1.27,13.97) 11(-1.27,11.43) 12(1.27,11.43) 13(-1.27,8.89) 14(1.27,8.89) 15(-1.27,6.35) 16(1.27,6.35) 17(-1.27,3.81) 18(1.27,3.81) 19(-1.27,1.27) 20(1.27,1.27) 21(-1.27,-1.27) 22(1.27,-1.27) 23(-1.27,-3.81) 24(1.27,-3.81) 25(-1.27,-6.35) 26(1.27,-6.35) 27(-1.27,-8.89) 28(1.27,-8.89) 29(-1.27,-11.43) 30(1.27,-11.43) 31(-1.27,-13.97) 32(1.27,-13.97) 33(-1.27,-16.51) 34(1.27,-16.51) 35(-1.27,-19.05) 36(1.27,-19.05) 37(-1.27,-21.59) 38(1.27,-21.59) 39(-1.27,-24.13) 40(1.27,-24.13)
DC005
  oval 2x4 hole 1x3: 1(6,0) 2(0,0)
  oval 3.5x2 hole 2.5x1: 3(3.5,-4.65)
FH12-50S-05SH
  rect 0.28x1.3 smd: 1(-12.25,3.25) 2(-11.75,3.25) 3(-11.25,3.25) 4(-10.75,3.25) 5(-10.25,3.25) 6(-9.75,3.25) 7(-9.25,3.25) 8(-8.75,3.25) 9(-8.25,3.25) 10(-7.75,3.25) 11(-7.25,3.25) 12(-6.75,3.25) 13(-6.25,3.25) 14(-5.75,3.25) 15(-5.25,3.25) 16(-4.75,3.25) 17(-4.25,3.25) 18(-3.75,3.25) 19(-3.25,3.25) 20(-2.75,3.25) 21(-2.25,3.25) 22(-1.75,3.25) 23(-1.25,3.25) 24(-0.75,3.25) 25(-0.25,3.25) 26(0.25,3.25) 27(0.75,3.25) 28(1.25,3.25) 29(1.75,3.25) 30(2.25,3.25) 31(2.75,3.25) 32(3.25,3.25) 33(3.75,3.25) 34(4.25,3.25) 35(4.75,3.25) 36(5.25,3.25) 37(5.75,3.25) 38(6.25,3.25) 39(6.75,3.25) 40(7.25,3.25) 41(7.75,3.25) 42(8.25,3.25) 43(8.75,3.25) 44(9.25,3.25) 45(9.75,3.25) 46(10.25,3.25) 47(10.75,3.25) 48(11.25,3.25) 49(11.75,3.25) 50(12.25,3.25)
  rect 1.8x2.2 smd: 51(-14.15,0) 52(14.15,0)
HDR254M-2X5
  rect 1.524x1.524 hole 1.016: 1(-1.27,5.08)
  round 1.524 hole 1.016: 2(1.27,5.08) 3(-1.27,2.54) 4(1.27,2.54) 5(-1.27,0) 6(1.27,0) 7(-1.27,-2.54) 8(1.27,-2.54) 9(-1.27,-5.08) 10(1.27,-5.08)
HOLE_5R3_2
  round 5 hole 3.2: 1(0,0)
IND5020
  rect 1.8x4.5 smd: 1(-2.05,0) 2(2.05,0)
JUMPER2
  rect 1.6x1.6 hole 1.05: 1(0,0)
  round 1.6 hole 1.05: 2(0,2.54) 3(2.54,0) 4(2.54,2.54)
JUMPER4
  rect 1.6x1.6 hole 1.05: 1(0,0)
  round 1.6 hole 1.05: 2(0,2.54) 3(2.54,0) 4(2.54,2.54) 5(5.08,0) 6(5.08,2.54) 7(7.62,0) 8(7.62,2.54)
JUMPER7
  rect 1.6x1.6 hole 1.05: 1(0,0)
  round 1.6 hole 1.05: 2(0,2.54) 3(2.54,0) 4(2.54,2.54) 5(5.08,0) 6(5.08,2.54) 7(7.62,0) 8(7.62,2.54) 9(10.16,0) 10(10.16,2.54) 11(12.7,0) 12(12.7,2.54) 13(15.24,0) 14(15.24,2.54)
L0603
  rect 0.599x0.851 smd: 1(-0.61,0) 2(0.61,0)
L2520M
  rect 1.3x2.5 smd: 1(-1.27,0) 2(1.27,0)
LED0603
  rect 1.1x1 smd: 1(0.85,0) 2(-0.85,0)
R0603
  rect 0.76x0.8 smd: 1(-0.76,0) 2(0.76,0)
R0805
  rect 1x1.25 smd: 1(-1,0) 2(1,0)
R1210
  rect 1.6x2.7 smd: 1(-1.4,0) 2(1.4,0)
SGM2035-UTDFN6
  rect 0.28x0.7 smd: 1(-0.5,-0.8) 2(0,-0.8) 3(0.5,-0.8) 4(0.5,0.8) 5(0,0.8) 6(-0.5,0.8)
  rect 1.3x0.5 smd: 7(0,0)
SMT7X5
  rect 1.399x0.991 smd: 1(-3,-2.2) 2(3,-2.2) 3(3,2.2) 4(-3,2.2)
SOP8
  oval 0.6x2.2 smd: 1(-1.905,-3.5) 2(-0.635,-3.5) 3(0.635,-3.5) 4(1.905,-3.5) 5(1.905,3.5) 6(0.635,3.5) 7(-0.635,3.5) 8(-1.905,3.5)
SOP65P778X200-28N
  oval 0.4x2 smd: 1(-4.225,-3.5) 2(-3.575,-3.5) 3(-2.925,-3.5) 4(-2.275,-3.5) 5(-1.625,-3.5) 6(-0.975,-3.5) 7(-0.325,-3.5) 8(0.325,-3.5) 9(0.975,-3.5) 10(1.625,-3.5) 11(2.275,-3.5) 12(2.925,-3.5) 13(3.575,-3.5) 14(4.225,-3.5) 15(4.225,3.5) 16(3.575,3.5) 17(2.925,3.5) 18(2.275,3.5) 19(1.625,3.5) 20(0.975,3.5) 21(0.325,3.5) 22(-0.325,3.5) 23(-0.975,3.5) 24(-1.625,3.5) 25(-2.275,3.5) 26(-2.925,3.5) 27(-3.575,3.5) 28(-4.225,3.5)
SOT-23-5
  rect 0.711x0.991 smd: 1(-0.953,-1.3) 2(0.048,-1.3) 3(1.048,-1.3) 4(0.953,1.3) 5(-1.048,1.3)
SOT-223
  rect 1x1.5 smd: 1(-2.286,-3.15) 2(0,-3.15) 3(2.286,-3.15)
  rect 3.28x1.5 smd: 4(0,3.15)
SS24
  rect 2.4x2.4 smd: 1(-2.2,0) 2(2.2,0)
SW_BUT_SMD
  rect 2.108x1.397 smd: 1(-4.5,2) 2(4.5,2) 3(4.5,-2) 4(-4.5,-2)
SW_SDA_8P
  rect 2.16x1.5 smd: 1(-4.115,3.81) 2(-4.115,1.27) 3(-4.115,-1.27) 4(-4.115,-3.81) 5(4.115,-3.81) 6(4.115,-1.27) 7(4.115,1.27) 8(4.115,3.81)
SWCS12
  rect 2.009x3.99 hole 1.191x1.801: 1(-4.7,0)
  oval 2.009x3.99 hole 1.191x1.801: 2(0,0) 3(4.7,0)
TDFN12
  rect 0.6x0.2 smd: 1(-0.75,1) 2(-0.75,0.6) 3(-0.75,0.2) 4(-0.75,-0.2) 5(-0.75,-0.6) 6(-0.75,-1) 7(0.75,-1) 8(0.75,-0.6) 9(0.75,-0.2) 10(0.75,0.2) 11(0.75,0.6) 12(0.75,1)
  rect 0.5x1.8 smd: 13(0,0)
TQFN-3X3-16L
  oval 0.8x0.28 smd: 1(-1.5,0.75) 2(-1.5,0.25) 3(-1.5,-0.25) 4(-1.5,-0.75) 9(1.5,-0.75) 10(1.5,-0.25) 11(1.5,0.25) 12(1.5,0.75)
  oval 0.28x0.8 smd: 5(-0.75,-1.5) 6(-0.25,-1.5) 7(0.25,-1.5) 8(0.75,-1.5) 13(0.75,1.5) 14(0.25,1.5) 15(-0.25,1.5) 16(-0.75,1.5)
  rect 1.7x1.7 smd: 17(0,0)
unnamed
  round 1.016 smd: 1(0,0)
USB_AB
  rect 0.4x1.6 smd: 1(-1.3,3.15) 2(-0.65,3.15) 3(0,3.15) 4(0.65,3.15) 5(1.3,3.15)
  oval 1.2x1.7 hole 0.6x1.1: S1(-3.6,3.45) S3(3.6,3.45)
  oval 1.2x2 hole 0.6x1.4: S2(-3.6,0) S4(3.6,0)
UTDFN-12X12-4L
  custom 0.48x0.36 smd: 1(-0.5,-0.4) 2(0.5,-0.4) 3(0.5,0.4) 4(-0.5,0.4)
  custom 0.815x0.815 smd rot 45: 5(0,0)
WQFN-20L
  oval 0.8x0.28 smd: 1(-2,1) 2(-2,0.5) 3(-2,0) 4(-2,-0.5) 5(-2,-1) 11(2,-1) 12(2,-0.5) 13(2,0) 14(2,0.5) 15(2,1)
  oval 0.28x0.8 smd: 6(-1,-2) 7(-0.5,-2) 8(0,-2) 9(0.5,-2) 10(1,-2) 16(1,2) 17(0.5,2) 18(0,2) 19(-0.5,2) 20(-1,2)
  rect 2.7x2.7 smd: 21(0,0)

## Nets
AVDD: C64.2 J17.10 U15.13(VO3)
AVDD_IN: FF2.40(AVDD#40) FF2.41(AVDD#41) J19.10
AVDD_OUT: FF1.40(AVDD#40) FF1.41(AVDD#41) J17.9 J19.9
GND: C1.2 C2.2 C3.2 C4.2 C5.2 C6.2 C7.2 C8.2 C10.2 C11.2 C12.2 C13.2 C15.2 C16.2 C18.2 C19.2 C21.2 C22.2 C23.2 C24.2 C25.2 C26.2 C27.2 C28.2 C33.2 C34.2 C35.2 C36.2 C37.2 C38.2 C39.2 C44.2 C45.2 C46.2 C47.2 C48.2 C49.1 C50.2 C51.2 C52.2 C53.2 C54.2 C55.2 C56.2 C57.2 C58.2 C59.2 C60.2 C61.2 C62.2 C63.1 C64.1 C65.1 C66.1 C67.2 C68.1 C69.2 C70.1 C74.2 C75.1 C76.1 C77.2 C78.2 C79.2 C80.1 C81.2 C82.1 C83.1 C84.1 C85.2 C86.2 C87.2 C88.2 C89.2 C90.2 C91.2 C92.2 C93.2 C94.2 C99.2 C100.1 C101.2 C102.2 D3.1(CATHODE) D5.1(CATHODE) F11.1 FF1.1(GND_0) FF1.4(GND_1) FF1.7(GND_2) FF1.10(GND_3) FF1.13(GND_4) FF1.16(GND_5) FF1.21(GND_6) FF1.26(GND_7) FF1.32(GND_8) FF1.33(GND_9) FF1.36(GND_10) FF1.39(GND_11) FF1.42(GND_12) FF1.51 FF1.52 FF2.1(GND_0) FF2.4(GND_1) FF2.7(GND_2) FF2.10(GND_3) FF2.13(GND_4) FF2.16(GND_5) FF2.21(GND_6) FF2.26(GND_7) FF2.32(GND_8) FF2.33(GND_9) FF2.36(GND_10) FF2.39(GND_11) FF2.42(GND_12) FF2.51 FF2.52 GH1.1(TP) GH2.1(TP) GH3.1(TP) GH4.1(TP) GH5.1(TP) GH6.1(TP) IC1.7(GND_1) IC1.18(GND_2) IC1.21(GND_3) IC1.25(AGND) J2.2 J2.10 J9.14 J9.16 J9.17 J9.18 J9.19 J9.20 J10.4 J10.5 J10.6 J10.7 J10.23 J10.26 J10.29 J10.32 J10.38 J11.7 J11.8 J11.9 J11.10 J12.14 J12.16 J12.17 J12.18 J12.19 J12.20 J13.4 J13.5 J13.6 J13.7 J13.23 J13.26 J13.29 J13.32 J13.38 J14.7 J14.8 J14.9 J14.10 J15.2(B) J15.3(GND) J18.2 J20.2 J22.17 J22.19 J22.20 J22.21 J22.22 J24.5(G) J24.S1 J24.S2 J24.S3 J24.S4 J25.5 J26.29 J26.31 J26.32 L7.1 LED6.1(CATHODE) R2.1 R49.1 R51.2 R53.2 R54.2 SW2.5(B4) SW2.6(B3) SW2.7(B2) SW2.8(B1) SW5.3 SW6.3 U2.2(GND) U4.1(ADJ) U5.1(ADJ) U6.5(AGND) U6.13(PGND) U6.14(PGND1) U6.21(GND1) U7.5(GND) U8.1(ADJ) U9.2(GND) U10.1(MT1) U10.2(MT2) U10.3(MT3) U10.4(MT4) U10.A12(DGND#A12) U10.C3(MIPI2_VSSA) U10.E3(DGND#E3) U10.E6(DGND#E6) U10.E7(DGND#E7) U10.E10(DGND#E10) U10.F8(DGND#F8) U10.G5(DGND#G5) U10.H3(DGND#H3) U10.H6(DGND#H6) U10.H7(DGND#H7) U10.J10(DGND#J10) U10.K3(MIPI1_VSSA) U10.K8(DGND#K8) U10.M12(DGND#M12) U11.4(VSS) U13.5(GND) U13.7(PSYNC) U13.13(GND1) U14.2(GND) U14.7(EP) U15.2(PGND1) U15.6(CT) U15.7(AGND) U15.14(PGND2) U15.17(EP)
GND_SIGNAL: F11.2 U10.G1(MIPI_VSSPLL)
VCC5_0: C33.1 C34.1 C35.1 C37.1 C38.1 C44.1 C45.1 C59.1 C60.1 R43.1 SW3.1(COMMON) U4.3(VIN) U5.3(VIN) U8.3(VIN)
VDD18: C93.1 C94.1 JP14.1 JP14.3 U10.A10(VDD18)
VDD_MIPI1: C13.1 C15.1 JP7.2 U10.J3(MIPI1_VDDA)
VDD_MIPI2: C8.1 C10.1 JP7.4 U10.D3(MIPI2_VDDA)
VDD_PLL: C16.1 C18.1 JP8.2 JP8.4 U10.F1(MIPI_VDDPLL)
VDDIO_12V: C56.1 C57.1 JP2.2 JP3.2 JP4.2 JP5.2 JP7.1 JP7.3 JP8.1 JP8.3 JP9.1 JP9.3 JP13.2 JP15.2 R72.2 U7.1(OUT)
VDDIO_18V: C46.1 C47.1 JP2.4 JP3.4 JP4.4 JP5.4 JP13.4 JP14.2 JP14.4 JP15.4 R56.1 R95.2 U5.2(VOUT) U5.4(NC)
VDDIO_25V: C61.1 C62.1 JP2.6 JP3.6 JP4.6 JP5.6 JP13.6 JP15.6 U8.2(VOUT) U8.4(NC)
VDDIO_33V: C2.1 C3.1 C4.1 C36.1 C39.1 JP2.8 JP3.8 JP4.8 JP5.8 JP13.8 JP15.8 R96.2 R98.2 U2.1(OE) U2.4(VDD) U4.2(VOUT) U4.4(NC)
VDDIO_AUX: C99.1 R92.2 R97.1
VDDIO_BANK0: C5.1 C7.1 JP4.1 JP4.3 JP4.5 JP4.7 U10.L12(VDDIO_B0)
VDDIO_BANK1: C85.1 C86.1 JP15.1 JP15.3 JP15.5 JP15.7 U10.K11(VDDIO_B1)
VDDIO_BANK2: C19.1 C21.1 JP5.1 JP5.3 JP5.5 JP5.7 U10.K12(VDDIO_B2)
VDDIO_BANK3: C6.1 C11.1 C12.1 C68.2 JP3.1 JP3.3 JP3.5 JP3.7 R79.1 R80.1 R81.1 U10.A11(VDDIO_B3#A11) U10.B12(VDDIO_B3#B12) U11.8(VCC)
VDDIO_BANK4: C87.1 C88.1 C89.1 J2.4 JP2.1 JP2.3 JP2.5 JP2.7 R3.2 R7.2 R8.2 R9.2 R70.2 R90.2 R97.2 U10.A3(VDDIO_B4#A3) U10.B3(VDDIO_B4#B3)
BL_A: F3.2 J17.4
BL_A_IN: FF2.47(BACKLIGHT_A#47) FF2.48(BACKLIGHT_A#48) J19.4
BL_A_OUT: FF1.47(BACKLIGHT_A#47) FF1.48(BACKLIGHT_A#48) J17.3 J19.3
BL_K: J17.2 U6.6(LED6)
BL_K_IN: FF2.49(BACKLIGHT_K#49) FF2.50(BACKLIGHT_K#50) J19.2
BL_K_OUT: FF1.49(BACKLIGHT_K#49) FF1.50(BACKLIGHT_K#50) J17.1 J19.1
CMOS_SCL_3: J9.1 J10.1 R14.1
CMOS_SCL_4: J12.1 J13.1 R38.1
CMOS_SDA_3: J9.2 J10.2 R15.1
CMOS_SDA_4: J12.2 J13.2 R39.1
CORE_H6: C24.1 C25.1 C26.1 C27.1 C28.1 C90.1 C91.1 C92.1 JP9.2 JP9.4 U10.F5(VDD_CORE#F5) U10.F6(VDD_CORE#F6) U10.F7(VDD_CORE#F7) U10.G6(VDD_CORE#G6) U10.G7(VDD_CORE#G7) U10.G8(VDD_CORE#G8)
CRST_N: C1.1 R3.1 SW5.2 U10.C4(CRST_N_4)
CTRL: J8.3 J8.7 U15.9(CTRL)
EFUSE_VDD: C22.1 C23.1 JP10.1 JP13.1 JP13.3 JP13.5 JP13.7 U10.B11(VDD_EFUSE)
ELVDD: C63.2 JP12.1 U15.3(VO1) U15.4(FBS)
ELVDD/VSP: J17.8 JP11.2 JP12.2
ELVDD/VSP_IN: FF2.43(ELVDD/VSP#43) FF2.44(ELVDD/VSP#44) J19.8
ELVDD_OUT: FF1.43(ELVDD/VSP#43) FF1.44(ELVDD/VSP#44) J17.7 J19.7
ELVSS: C65.2 C66.2 JP12.3 U15.10(VO2)
ELVSS/VSN: J17.6 JP11.4 JP12.4
ELVSS/VSN_IN: FF2.45(ELVSS/VSN#45) FF2.46(ELVSS/VSN#46) J19.6
ELVSS_OUT: FF1.45(ELVSS/VSN#45) FF1.46(ELVSS/VSN#46) J17.5 J19.5
EN1: J8.1 U15.8(EN_VO3)
FD: J8.5 U15.5(FD)
FLS_CS#: R79.2 U10.D12(IO44_CSN_3) U11.1(CS#)
FLS_HOLD: R80.2 U10.B7(IO23_HOLD_3) U11.7(HOLD#/IO3)
FLS_MISO: U10.C12(IO42_MISO_3) U11.2(SO/IO1)
FLS_MOSI: U10.C11(IO25_MOSI_3) U11.5(SI/IO0)
FLS_SCLK: U10.D11(IO27_SCK_3) U11.6(SCLK)
FLS_WP: R81.2 U10.K10(IO40_WP_3) U11.3(WP#/IO2)
IN_PANEL_RST: FF2.27(PANEL_RST) J18.5
IN_SPI_CS: FF2.22(SPI_CS) J18.14
IN_SPI_MISO: FF2.23(SPI_MISO) J18.12
IN_SPI_MOSI: FF2.24(SPI_MOSI) J18.10
IN_SPI_SCK: FF2.25(SPI_SCK) J18.8
IN_SWIRE: FF2.29(SWIRE) J18.6
IN_TE: FF2.28(TE) J18.3
IN_TP_INT: FF2.17(TP_I\N\T\) J18.13
IN_TP_RST: FF2.18(TP_RST) J18.11
IN_TP_SCL: FF2.20(TP_SCL) J18.7 R84.2
IN_TP_SDA: FF2.19(TP_SDA) J18.9 R85.2
IN_USER1: FF2.30(USER_IO1) J18.4
IN_USER2: FF2.31(USER_IO2) J18.1
IO1_4: J26.30 U10.K6(IO1_4)
IO2_4: J26.28 U10.J5(IO2_4)
IO03_JM_B_4: JP1.1 U10.M3(IO3_JM_B_4)
IO04_TCK: J2.1 U10.L3(IO4_TCK_4)
IO05_TMS: J2.5 U10.M4(IO5_TMS_4)
IO06_TDI: J2.9 U10.L4(IO6_TDI_4)
IO07_TDO: J2.3 U10.K4(IO7_TDO_4)
IO8_4: J26.26 U10.H4(IO8_4)
IO9_4: J26.24 U10.G3(IO9_4)
IO10_4: J26.22 U10.F2(IO10_4)
IO11_4: J26.14 U10.G2(IO11_4)
IO12_4: J26.20 U10.F3(IO12_4)
IO13_4: J26.12 U10.E4(IO13_4)
IO14_4: J26.10 U10.B4(IO14_4)
IO15_CFDONE_4: R1.2 U10.A4(IO15_CDONE_4)
IO16_4: J26.8 U10.D5(IO16_4)
IO17_CLK0_4: J26.16 U10.B5(IO17_CLK0_4)
IO18_CLK1: J26.5 R4.1
IO18_CLK1_4: J26.6 U10.A5(IO18_CLK1_4)
IO19_4: J26.18 U10.C6(IO19_4)
IO20_MSEL1_4: J26.2 U10.B6(IO20_MSEL1_4)
IO21_MSEL0_4: J26.4 U10.A6(IO21_MSEL0_4)
IO22_3: J22.15 U10.A7(IO22_3)
IO24_3: J22.13 U10.A8(IO24_3)
IO26_3: J22.11 U10.B8(IO26_3)
IO28_3: J22.9 U10.D10(IO28_3)
IO29_3: J22.7 U10.A9(IO29_3)
IO30_3: J22.5 U10.B9(IO30_3)
IO31_CLK2_3: J22.3 U10.C9(IO31_CLK2_3)
IO32_CLK3_3: J22.1 U10.B10(IO32_CLK3_3)
IO33_3: J22.18 U10.C10(IO33_3)
IO34_3: J22.16 U10.D8(IO34_3)
IO35_3: J22.14 U10.C7(IO35_3)
IO36_3: J22.12 U10.E9(IO36_3)
IO37_3: J22.10 U10.F10(IO37_3)
IO38_3: J22.8 U10.G10(IO38_3)
IO39_3: J22.6 U10.H9(IO39_3)
IO41_3: J22.4 U10.J8(IO41_3)
IO43_3: J22.2 U10.K7(IO43_3)
IOVCC_IN: FF2.37(IOVCC#37) FF2.38(IOVCC#38) J19.12 R84.1 R85.1
IOVCC_OUT: FF1.37(IOVCC#37) FF1.38(IOVCC#38) J17.11 J19.11 R82.1 R83.1
LCD_IOVCC_3: J10.10 J11.2 R14.2 R15.2
LCD_IOVCC_4: J13.10 J14.2 R38.2 R39.2
LCD_RESET_3: J9.11 J10.35
LCD_RESET_4: J12.11 J13.35
LCD_SPI_CLK_3: J9.8 J10.16
LCD_SPI_CLK_4: J12.8 J13.16
LCD_SPI_CS_3: J9.6 J10.14
LCD_SPI_CS_4: J12.6 J13.14
LCD_SPI_MISO_3: J9.10 J10.18
LCD_SPI_MISO_4: J12.10 J13.18
LCD_SPI_MOSI_3: J9.7 J10.17
LCD_SPI_MOSI_4: J12.7 J13.17
LCD_VCC_3: J10.11 J11.1
LCD_VCC_4: J13.11 J14.1
LCM_INT_3: J9.4 J10.12
LCM_INT_4: J12.4 J13.12
LCM_RES_3: J9.5 J10.13
LCM_RES_4: J12.5 J13.13
LED0: D6.1(CATHODE) J26.17
LED1: D7.1(CATHODE) J26.19
LEDA_3: J10.40 J11.6
LEDA_4: J13.40 J14.6
LEDK_3: J10.39 J11.5
LEDK_4: J13.39 J14.5
LVDS_01N: R78.2 U10.L5(IO_01N_0)
LVDS_01N_C: J10.36 R76.1 R78.1
LVDS_01P: R77.2 U10.M5(IO_01P_0)
LVDS_01P_C: J10.37 R76.2 R77.1
LVDS_02N: R75.2 U10.L6(IO_02N_0)
LVDS_02N_C: J10.21 R73.1 R75.1
LVDS_02P: R74.2 U10.M6(IO_02P_0)
LVDS_02P_C: J10.22 R73.2 R74.1
LVDS_03N: R18.2 U10.L7(IO_03N_1)
LVDS_03N_C: J10.33 R18.1 R26.1 R60.1
LVDS_03P: R16.2 U10.M7(IO_03P_1)
LVDS_03P_C: J10.34 R16.1 R27.2 R60.2
LVDS_04N: R22.2 U10.L8(IO_04N_CLK_1)
LVDS_04N_C: J10.27 R22.1 R61.1
LVDS_04P: R20.2 U10.M8(IO_04P_CLK_1)
LVDS_04P_C: J10.28 R20.1 R61.2
LVDS_05N: R28.2 U10.L9(IO_05N_1)
LVDS_05N_C: J10.30 R28.1 R62.1
LVDS_05P: R24.2 U10.M9(IO_05P_1)
LVDS_05P_C: J10.31 R24.1 R62.2
LVDS_06N: R32.2 U10.L10(IO_06N_1)
LVDS_06N_C: J10.24 R32.1 R63.1
LVDS_06P: R30.2 U10.M10(IO_06P_1)
LVDS_06P_C: J10.25 R30.1 R63.2
LVDS_07N: R36.2 U10.L11(IO_07N_1)
LVDS_07N_C: J13.36 R36.1 R64.1
LVDS_07P: R34.2 U10.M11(IO_07P_1)
LVDS_07P_C: J13.37 R34.1 R64.2
LVDS_08N: R37.2 U10.J11(IO_08N_2)
LVDS_08N_C: J13.33 R37.1 R40.1 R69.1
LVDS_08P: R35.2 U10.J12(IO_08P_2)
LVDS_08P_C: J13.34 R35.1 R41.2 R69.2
LVDS_09N: R19.2 U10.H11(IO_09N_2)
LVDS_09N_C: J13.30 R19.1 R65.1
LVDS_09P: R17.2 U10.H12(IO_09P_2)
LVDS_09P_C: J13.31 R17.1 R65.2
LVDS_10N: R23.2 U10.G11(IO_10N_2)
LVDS_10N_C: J13.24 R23.1 R66.1
LVDS_10P: R21.2 U10.G12(IO_10P_2)
LVDS_10P_C: J13.25 R21.1 R66.2
LVDS_11N: R29.2 U10.F11(IO_11N_2)
LVDS_11N_C: J13.21 R29.1 R67.1
LVDS_11P: R25.2 U10.F12(IO_11P_2)
LVDS_11P_C: J13.22 R25.1 R67.2
LVDS_12N: R33.2 U10.E11(IO_12N_CLK_2)
LVDS_12N_C: J13.27 R33.1 R68.1
LVDS_12P: R31.2 U10.E12(IO_12P_CLK_2)
LVDS_12P_C: J13.28 R31.1 R68.2
MIPI_RX0_LPN: J26.9 R26.2
MIPI_RX0_LPP: J26.11 R27.1
MIPI_RX1_LPN: J26.13 R40.2
MIPI_RX1_LPP: J26.15 R41.1
MIPIIN_CKN: FF2.8(DSI_CLKN) U10.K2(MIPI1_CKN)
MIPIIN_CKP: FF2.9(DSI_CLKP) U10.K1(MIPI1_CKP)
MIPIIN_D0N: FF2.5(DSI_D0N) U10.L2(MIPI1_DN0)
MIPIIN_D0P: FF2.6(DSI_D0P) U10.L1(MIPI1_DP0)
MIPIIN_D1N: FF2.11(DSI_D1N) U10.J2(MIPI1_DN1)
MIPIIN_D1P: FF2.12(DSI_D1P) U10.J1(MIPI1_DP1)
MIPIIN_D2N: FF2.14(DSI_D2N) U10.M2(MIPI1_DN2)
MIPIIN_D2P: FF2.15(DSI_D2P) U10.M1(MIPI1_DP2)
MIPIIN_D3N: FF2.2(DSI_D3N) U10.H2(MIPI1_DN3)
MIPIIN_D3P: FF2.3(DSI_D3P) U10.H1(MIPI1_DP3)
MIPIOUT_CKN: FF1.8(DSI_CLKN) U10.C2(MIPI2_CKN)
MIPIOUT_CKP: FF1.9(DSI_CLKP) U10.C1(MIPI2_CKP)
MIPIOUT_D0N: FF1.5(DSI_D0N) U10.B2(MIPI2_DN0)
MIPIOUT_D0P: FF1.6(DSI_D0P) U10.B1(MIPI2_DP0)
MIPIOUT_D1N: FF1.11(DSI_D1N) U10.D2(MIPI2_DN1)
MIPIOUT_D1P: FF1.12(DSI_D1P) U10.D1(MIPI2_DP1)
MIPIOUT_D2N: FF1.14(DSI_D2N) U10.A2(MIPI2_DN2)
MIPIOUT_D2P: FF1.15(DSI_D2P) U10.A1(MIPI2_DP2)
MIPIOUT_D3N: FF1.2(DSI_D3N) U10.E2(MIPI2_DN3)
MIPIOUT_D3P: FF1.3(DSI_D3P) U10.E1(MIPI2_DP3)
MSEL0: J26.3 R7.1 SW2.3(A3)
MSEL1: J26.1 R8.1 SW2.4(A4)
MTP_7V5_3: J9.13 J9.15 J10.15
MTP_7V5_4: J12.13 J12.15 J13.15
OUT_PANEL_RST: FF1.27(PANEL_RST) J20.5
OUT_SPI_CS: FF1.22(SPI_CS) J20.14
OUT_SPI_MISO: FF1.23(SPI_MISO) J20.12
OUT_SPI_MOSI: FF1.24(SPI_MOSI) J20.10
OUT_SPI_SCK: FF1.25(SPI_SCK) J20.8
OUT_SWIRE: FF1.29(SWIRE) J20.6
OUT_TE: FF1.28(TE) J20.3
OUT_TP_INT: FF1.17(TP_I\N\T\) J20.13
OUT_TP_RST: FF1.18(TP_RST) J20.11
OUT_TP_SCL: FF1.20(TP_SCL) J20.7 R82.2
OUT_TP_SDA: FF1.19(TP_SDA) J20.9 R83.2
OUT_USER1: FF1.30(USER_IO1) J20.4
OUT_USER2: FF1.31(USER_IO2) J20.1
P1P8V: J17.12 R50.1 R86.1 R87.2 R95.1
P3P3V: C77.1 C79.1 C82.2 C83.2 C84.2 L5.1 L6.1 L8.1 R46.1 R47.1 R96.1 U13.8(VCI) U14.1(EN) U14.3(IN) U15.12(PVIN) U15.16(AVIN)
TP-INT1_3: J9.3 J10.3
TP-INT1_4: J12.3 J13.3
TP_RESET_3: J9.12 J10.20
TP_RESET_4: J12.12 J13.20
UART_CTS: IC1.11(CTS#) J25.2 J26.23
UART_RTS: IC1.3(RTS#) J25.1 J26.21
UART_RXD: IC1.5(RXD) J25.4 J26.27
UART_TXD: IC1.1(TXD) J25.3 J26.25
USB_3P3V: C100.2 IC1.17(3V3OUT) R91.1 R93.2 R94.2 R98.1
USB_5V: C101.1 C102.1 IC1.20(VCC) J24.1(V)
USB_DM: IC1.16(USBDM) J24.2(D-)
USB_DP: IC1.15(USBDP) J24.3(D+)
USER_IO_3: J9.9 J10.19
USER_IO_4: J12.9 J13.19
USER_SW0: J26.7 R70.1 SW6.2
VCI: J17.14 R55.2
VCI_IN: FF2.34(VCI#34) FF2.35(VCI#35) J19.14
VCI_OUT: FF1.34(VCI#34) FF1.35(VCI#35) J17.13 J19.13
VSN: C76.2 JP11.3 U13.11(VSN)
VSN_3: J10.8 J11.3
VSN_4: J13.8 J14.3
VSP: C75.2 JP11.1 U13.2(VSP)
VSP_3: J10.9 J11.4
VSP_4: J13.9 J14.4
N3324689: R4.2 U2.3(OUT)
N16652275: J2.6 JP10.2
N16725908: C54.1 C55.1 R56.2 R57.2 R71.2 U7.4(IN) U9.1(IN)
N16725940: R57.1 U7.3(EN)
N16725976: R71.1 U9.3(EN)
N16726004: R72.1 U9.5(OUT)
N16726066: C67.1 U9.4(BP)
N16726320: C58.1 U7.2(BIAS)
N16726398: J15.1(A) SW3.2(NO)
N16733042: C71.2 U13.1(C21P)
N16733092: C71.1 U13.12(C21M)
N16733096: C72.2 U13.3(C11P)
N16733100: C72.1 U13.4(C11M)
N16733108: C73.2 U13.10(C12P)
N16733112: C73.1 U13.9(C12M)
N16733128: C69.1 R86.2 U13.6(PWR_NE)
N16733224: C70.2 U14.6(BP)
N16733352: C74.1 R50.2 U6.1(EN)
N16733522: C52.1 R52.1 U6.20(COMP)
N16733558: R54.1 U6.2(FREQ)
N16733562: C53.1 R52.2
N16733598: C50.1 R48.2 R51.1 U6.12(OVP)
N16733674: D4.1(ANODE) L5.2 U6.15(LX) U6.16(LX1)
N16733678: C48.1 C49.2 D4.2(CATHODE) F3.1 R48.1 R49.2
N16733880: R47.2 U6.17(PWM)
N16733904: R53.1 U6.3(ISET)
N16733974: C78.1 R55.1 U14.4(OUT)
N16734108: C80.2 R46.2 U6.19(VIN)
N16734414: C51.1 U6.18(VDC)
N16735413: C81.1 J8.2 J8.4 J8.6 R87.1
N16735597: L6.2 U15.1(SW1)
N16735609: L7.2 U15.11(SW2)
N16735621: L8.2 U15.15(SW3)
N16775166: LED6.2(ANODE) R91.2
N16775386: IC1.4(VCCIO) R92.1
N16775478: D8.1(CATHODE) IC1.23(CBUS0)
N16775482: D9.1(CATHODE) IC1.22(CBUS1)
N16775518: D9.2(ANODE) R93.1
N16775522: D8.2(ANODE) R94.1
N167773310: D5.2(ANODE) R1.1
N167773411: JP1.2 R2.2
N167788470: D7.2(ANODE) R90.1
N167788810: D6.2(ANODE) R9.1
N167830511: D3.2(ANODE) R43.2

Pads without a net: IC1 2 6 8 9 10 12 13 14 19 24 26 27 28; J2 7 8; J8 8; J24 4; NOREF 1; NOREF#2 1; NOREF#3 1; NOREF#4 1; NOREF#5 1; NOREF#6 1; SW2 1 2; SW3 3; SW5 1 4; SW6 1 4; U6 4 7 8 9 10 11; U14 5

## Via types
v1: diameter 0.559, hole 0.254, TOP to BOTTOM, 493 vias
v2: diameter 0.406, hole 0.203, TOP to BOTTOM, 182 vias

## Routing (per net, layer and track width the routed paths; a pad name or vN(x,y) marks a point on that pad's centre or on a via; arc(x,y) is an arc through that point)
AVDD: length 8.5
  TOP w0.254: U15.13 96,110.73 v1(96.52,111.25)
  TOP w0.508: C64.2 v1(97.79,112.78) 97.79,112.52 v1(96.52,111.25)
  BOTTOM w0.381: J17.10 125.44,116.2 ; J17.10 124.46,117.18 ; J17.10 123.48,116.2 ; J17.10 124.46,115.23
AVDD_IN: length 41.8
  ART04 w0.508: v1(7.69,83.44) v1(8.51,83.44) 12.7,83.44 14.99,85.72 14.99,108.84 J19.10
AVDD_OUT: length 139.9
  ART03 w0.254: J17.9 119.63,116.2 119.03,115.6 74.07,115.6 73.37,114.9 60.2,114.9 59.4,115.7 39.75,115.7 39.12,116.33 11.56,116.33 10.13,114.9 6.38,114.9 J19.9
  BOTTOM w0.508: v1(121.92,98.3) v1(121.16,98.3) 120.14,99.31 120.14,105.16 119,106.3 119,113.28 J17.9
GND: length 2272.5
  TOP w0.16: FF1.52 121.59,104.96 121.54,104.9 ; FF1.52 124.66,104.96 124.71,104.9 ; FF1.52 123.19,106.3 ; FF1.52 123.19,103.63 ; R2.1 v1(39.37,78.49) ; D3.1 v1(106.05,16.5) ; v1(118.24,42.56) 119.27,42.56 119.28,42.55 U7.5 119.48,42.55 119.49,42.56 v1(120.4,42.56) ; FF1.1 v1(118.68,78.56) ; 94.25,124.46 U13.7
  TOP w0.2: v2(61.72,61.98) 61.98,61.98 U10.M12 ; v1(93.6,123.06) 94.09,123.06 94.25,123.22 U13.7 ; U10.A12 68.05,62.25 v2(68.33,61.98)
  TOP w0.254: C50.2 v1(76.83,123.06) ; U6.21 80.01,114.35 ; 80.01,114.35 79.51,114.85 U6.14 v1(79.51,116.58) ; 80.01,114.35 U6.13 ; FF1.4 v1(118.66,80.06) ; FF2.33 10.74,87.05 v1(10.92,86.87) ; v1(95.76,108.08) 95.5,107.82 U15.7 95.5,106.42 v1(95.25,106.17) 95,106.42 U15.6 95,107.95 v1(94.87,108.08) ; FF2.26 v1(10.92,90.56) ; FF2.7 v1(10.92,100.05) ; FF1.42 v1(118.75,99.05) ; FF1.26 v1(118.75,91.05) ; v1(81.01,110.89) U6.5 81.01,112.67 v1(80.77,112.9) ; v1(94.36,126.62) 94.65,126.33 U13.5 94.65,124.46 ; U14.2 U14.7 ; U14.7 v1(113.03,102.36) ; U14.7 v1(113.03,104.65) ; v1(93.6,124.46) 94.65,124.46 ; v1(95.76,108.97) 95.5,109.22 U15.14 95.5,111.12 95.76,111.38 v1(95.76,111.89) ; U15.2 94.74,108.83 v1(94.87,108.97) ; FF1.32 v1(118.8,94.05) ; v1(100.69,127.02) C75.1 v1(101.85,128.27) ; FF2.42 10.8,82.56 v1(10.92,82.68) ; FF1.16 v1(118.8,86.05) ; v1(118.75,88.56) FF1.21 ; FF2.13 v1(10.92,97.05) ; 94.65,124.46 U13.13 v1(96.9,124.46) ; SW2.7 v1(19.05,99.06) ; SW2.6 v1(19.18,101.6) ; C68.1 v1(105.41,55.5) ; FF1.36 v1(118.79,96.05) ; R53.2 v1(82.55,104.9) ; D5.1 v1(107.19,74.93) ; C74.2 v1(78.74,105.03) ; SW2.5 v1(19.18,104.14) ; v1(10.92,92.84) 10.7,93.05 FF2.21 ; C53.2 v1(74.93,108.33) ; C100.1 32.92,119.51 v1(33.51,118.93) ; FF2.39 10.78,84.06 v1(10.92,84.2) ; LED6.1 v1(30.23,121.28) ; R51.2 v1(78.11,123.06) ; FF2.1 v1(10.92,103.05) ; v1(121.16,94.36) 120.96,94.56 FF1.33 ; FF1.13 v1(118.77,84.56) ; v1(10.92,87.76) 10.72,87.56 FF2.32 ; FF1.39 v1(118.76,97.56) ; C70.1 v1(108.71,104.27) ; R54.2 v1(81.28,104.9) ; FF2.10 v1(10.92,98.56) ; U11.4 v1(111.94,53.47) ; v1(100.69,121.92) C76.1 v1(101.85,120.65) ; C1.2 v1(24.89,109.86) ; C80.1 v1(69.72,108.58) ; FF2.36 v1(10.88,85.56) ; FF2.16 v1(10.92,95.56) ; FF1.10 v1(118.75,83.06) ; C52.2 v1(77.47,105.03) ; FF1.7 v1(118.77,81.56) ; SW2.8 v1(19.05,96.52) ; FF2.4 v1(10.92,101.56) ; C51.2 v1(69.72,112.39)
  TOP w0.3: C56.2 v1(124.46,45.21) ; C58.2 v1(117.73,45.09) ; C55.2 v1(120.14,39.12) ; C57.2 v1(121.92,44.2)
  TOP w0.381: 8.89,66.97 8.89,67.94 ; 8.89,67.94 8.89,68.92 ; 8.89,67.94 7.91,67.94 ; 8.89,67.94 9.87,67.94 ; SW2.7 21.29,99.99 ; SW2.7 21.29,98.13 ; SW2.7 22.54,99.06 ; GH5.1 65.41,7.12 ; GH5.1 68.08,4.45 ; GH5.1 62.73,4.45 ; GH5.1 65.41,1.77 ; IC1.25 36.36,115.83 v1(36.66,115.53) ; GH4.1 68.08,132.72 ; GH4.1 65.41,130.04 ; GH4.1 65.41,135.39 ; GH4.1 62.73,132.72 ; SW2.8 22.54,96.52 ; SW2.8 21.29,95.59 ; SW2.8 21.29,97.45 ; C39.2 92.71,27.1 ; C39.2 93.29,26.55 ; C39.2 92.13,26.55 ; C39.2 92.71,25.99 ; 111.12,18.62 C37.2 ; C37.2 111.7,19.18 ; C37.2 110.55,19.18 ; 108.88,25.8 C44.2 ; C44.2 110.83,25.8 ; C44.2 109.86,26.58 ; C44.2 109.86,25.03 ; 5.08,1.77 GH2.1 ; GH2.1 2.4,4.45 ; GH2.1 5.08,7.12 ; GH2.1 7.76,4.45 ; J13.7 75.56,28.25 ; J13.7 74.62,27.3 ; J13.7 76.5,27.3 ; J13.7 75.56,26.36 ; J22.20 86.7,35.56 ; J22.20 85.72,36.54 ; J22.20 85.72,34.58 ; J22.20 84.75,35.56 ; C83.1 90.53,112.56 ; C83.1 90.53,110.96 ; C83.1 89.86,111.76 ; GH3.1 125.73,7.12 ; GH3.1 125.73,1.77 ; GH3.1 128.41,4.45 ; GH3.1 123.05,4.45 ; 47.62,26.36 J13.29 ; J13.29 48.56,27.3 ; J13.29 47.62,28.25 ; 81.33,111.67 U6.5 81.33,111.09 ; 43.31,134.37 J24.S2 ; J24.S2 44.87,134.37 ; J24.S2 44.09,135.54 ; J24.S2 44.09,133.19 ; C63.1 89.21,105.41 ; C63.1 88.53,106.21 ; C63.1 88.53,104.61 ; C62.2 93.29,9.4 ; C62.2 92.71,9.96 ; C62.2 92.71,8.84 ; C62.2 92.13,9.4 ; C54.2 115.91,33.42 ; C54.2 113.96,33.42 ; C54.2 114.94,34.2 ; 94.27,25.8 C36.2 ; C36.2 95.25,25.03 ; C36.2 95.25,26.58 ; C36.2 96.23,25.8 ; C84.1 103.23,112.56 ; C84.1 103.23,110.96 ; C84.1 102.56,111.76 ; C35.2 99.4,25.8 ; C35.2 98.42,26.58 ; C35.2 98.42,25.03 ; C35.2 97.45,25.8 ; SW5.3 14.75,114.88 ; SW5.3 13,114.88 ; SW5.3 13.88,116.11 ; SW5.3 13.88,113.65 ; 112.03,99.53 C77.2 ; C77.2 111.35,100.33 ; C77.2 112.71,100.33 ; 91.5,123.7 C69.2 ; C69.2 92.08,124.26 ; C69.2 92.65,123.7 ; 36.89,129.89 J24.S3 ; J24.S3 36.11,130.92 ; J24.S3 37.67,130.92 ; J24.S3 36.89,131.94 ; 45.09,99.35 J26.31 ; J26.31 45.09,101.31 ; J26.31 44.11,100.33 ; J26.31 46.06,100.33 ; 95.32,106.51 U15.6 95.16,106.51 ; 79.7,24.77 J13.4 ; J13.4 80.64,23.82 ; J13.4 80.64,25.7 ; 15.24,64.14 15.24,65.08 ; 15.24,64.14 16.18,64.14 ; 15.24,64.14 14.3,64.14 ; 15.24,64.14 15.24,63.2 ; 81.28,106.48 R54.2 81.86,105.92 ; 46.65,100.33 J26.29 ; J26.29 47.62,101.31 ; J26.29 47.62,99.35 ; J26.29 48.6,100.33 ; 21.29,100.67 SW2.6 ; SW2.6 21.29,102.53 ; SW2.6 22.54,101.6 ; 15.24,65.73 J9.18 ; J9.18 16.18,66.67 ; J9.18 14.3,66.67 ; C78.2 114.03,107.48 ; C78.2 114.03,105.88 ; C78.2 113.35,106.68 ; C61.2 96.23,8.66 ; C61.2 95.25,9.44 ; C61.2 94.27,8.66 ; C61.2 95.25,7.88 ; 49.5,47.07 U10.2 ; U10.2 51.93,49.5 ; U10.2 49.5,51.93 ; U10.2 47.07,49.5 ; 109.86,6.36 C33.2 ; C33.2 108.55,7.71 ; C33.2 109.86,9.06 ; C33.2 111.16,7.71 ; 78.05,105.92 C52.2 77.47,106.48 ; 45.09,96.81 J26.32 ; J26.32 44.11,97.79 ; J26.32 46.06,97.79 ; J26.32 45.09,98.77 ; 104.35,31.77 U5.1 ; U5.1 105.71,31.77 ; U5.1 105.03,30.85 ; U5.1 105.03,32.7 ; C1.2 23.62,110.43 ; C1.2 23.06,109.86 ; C1.2 23.62,109.28 ; 38.81,131.22 J24.5 ; J24.5 v1(39.19,129.7) ; J24.5 39.19,132.19 ; 51.77,24.77 J13.26 ; J13.26 52.7,23.82 ; J13.26 52.7,25.7 ; J13.26 53.65,24.77 ; 123.19,66.97 123.19,67.94 ; 123.19,67.94 122.21,67.94 ; 123.19,67.94 124.17,67.94 ; 123.19,67.94 123.19,68.92 ; 24.13,65.73 J10.38 23.19,66.67 ; 122.39,24 J15.2 ; J15.2 124.75,24 ; J15.2 123.57,21.82 ; J15.2 123.57,26.18 ; 41.6,15.88 J12.14 ; J12.14 42.55,16.82 ; J12.14 42.55,14.94 ; J12.14 43.48,15.88 ; J13.32 45.09,25.7 ; J13.32 46.02,24.77 ; J13.32 45.09,23.82 ; J13.32 44.15,24.77 ; 100.39,26.55 C38.2 ; C38.2 100.97,25.99 ; C38.2 101.54,26.55 ; C38.2 100.97,27.1 ; 45.83,113.67 C99.2 ; C99.2 46.95,113.67 ; C99.2 46.39,113.09 ; C99.2 46.39,114.24 ; C34.2 107.02,8.66 ; C34.2 105.07,8.66 ; C34.2 106.05,9.44 ; C34.2 106.05,7.88 ; FF2.51 6.35,106.03 ; FF2.51 7.63,104.96 ; FF2.51 6.35,103.88 ; 81.97,105.92 R53.2 82.55,106.48 ; 36.89,133.19 J24.S4 ; J24.S4 36.11,134.37 ; J24.S4 36.89,135.54 ; J24.S4 37.67,134.37 ; J13.23 56.19,27.3 ; J13.23 55.24,26.36 ; J13.23 55.24,28.25 ; 24.13,58.12 J10.32 ; J10.32 24.13,59.99 ; J10.32 23.19,59.05 ; 124.46,31.07 C67.2 124.46,32.18 ; 17.78,65.73 J9.17 ; J9.17 16.84,66.67 ; J9.17 18.72,66.67 ; 14.3,31.11 J11.10 ; J11.10 15.24,30.18 ; J11.10 16.18,31.11 ; J11.10 15.24,32.05 ; C70.1 109.86,104.82 ; C70.1 110.43,104.27 ; C70.1 109.86,103.71 ; 102.56,105.41 C66.1 ; C66.1 103.23,106.21 ; C66.1 103.23,104.61 ; 43.11,125.98 C102.2 ; C102.2 43.79,125.18 ; C102.2 43.79,126.79 ; 23.19,51.44 J10.26 ; J10.26 24.13,50.49 ; J10.26 25.07,51.44 ; J10.26 24.13,52.38 ; 106.68,25.03 C46.2 ; C46.2 105.7,25.8 ; C46.2 106.68,26.58 ; C46.2 107.66,25.8 ; C59.2 99.4,8.66 ; C59.2 98.42,7.88 ; C59.2 98.42,9.44 ; C59.2 97.45,8.66 ; 96.99,115.94 C64.1 ; C64.1 98.59,115.94 ; C64.1 97.79,115.26 ; 14.3,69.22 J9.20 ; J9.20 16.18,69.22 ; J9.20 15.24,70.16 ; 123.48,44.05 C56.2 ; C56.2 124.46,43.27 ; C56.2 125.44,44.05 ; U10.4 80.5,82.93 ; U10.4 82.93,80.5 ; U10.4 78.07,80.5 ; U10.4 80.5,78.07 ; J22.22 89.24,35.56 ; J22.22 88.27,36.54 ; J22.22 88.27,34.58 ; J22.22 87.29,35.56 ; C100.1 32.13,120.07 ; C100.1 31.55,119.51 ; C100.1 32.13,118.95 ; J2.2 27.61,87 ; J2.2 25.73,87 ; J2.2 26.67,87.94 ; J2.2 26.67,86.06 ; J2.10 27.61,76.83 ; J2.10 25.73,76.83 ; J2.10 26.67,75.89 ; 27.61,56.52 J10.29 25.73,56.52 ; 100.97,91.64 C4.2 ; C4.2 101.54,92.2 ; C4.2 100.39,92.2 ; 120.14,40.58 C55.2 119.59,39.43 ; U10.3 82.93,49.5 ; U10.3 80.5,51.93 ; U10.3 80.5,47.07 ; U10.3 78.07,49.5 ; J14.7 75.56,19.36 ; J14.7 75.56,17.48 ; J14.7 74.62,18.41 ; J14.7 76.5,18.41 ; 28.95,120.61 LED6.1 ; LED6.1 28.95,121.96 ; LED6.1 28.22,121.28 ; 34.92,14.94 J12.20 34.92,16.82 ; 23.19,23.5 J10.4 ; J10.4 25.07,23.5 ; J10.4 24.13,24.43 ; 83.19,32.04 J22.17 ; J22.17 83.19,34 ; J22.17 82.21,33.02 ; J22.17 84.16,33.02 ; 37.47,17.48 J12.17 ; J12.17 38.41,18.41 ; J12.17 37.47,19.36 ; J13.6 79.05,24.77 ; J13.6 78.11,23.82 ; J13.6 77.17,24.77 ; J13.6 78.11,25.7 ; 38.79,77.59 R2.1 ; R2.1 39.95,77.59 ; R2.1 39.37,77.04 ; 120.77,94.23 FF1.32 120.77,94.05 ; 17.78,27.64 J11.7 ; J11.7 17.78,29.52 ; J11.7 18.72,28.57 ; J11.7 16.84,28.57 ; 100.39,9.4 C60.2 ; C60.2 100.97,8.84 ; C60.2 101.54,9.4 ; C60.2 100.97,9.96 ; 102.23,91.64 C3.2 ; C3.2 102.81,92.2 ; C3.2 101.66,92.2 ; J10.5 27.61,26.04 ; J10.5 25.73,26.04 ; J10.5 26.67,26.98 ; J10.5 26.67,25.09 ; 103.23,112.86 C82.1 ; C82.1 103.23,114.47 ; C82.1 102.56,113.67 ; 16.84,31.11 J11.9 ; J11.9 18.72,31.11 ; J11.9 17.78,30.18 ; J11.9 17.78,32.05 ; 111.82,26.55 C45.2 ; C45.2 112.39,25.99 ; C45.2 112.39,27.1 ; C45.2 112.97,26.55 ; 84.75,33.02 J22.19 ; J22.19 86.7,33.02 ; J22.19 85.72,32.04 ; J22.19 85.72,34 ; 80.01,116.24 U6.13 79.69,116.24 ; J25.5 45.09,107.66 ; J25.5 46.06,106.68 ; J25.5 44.11,106.68 ; J25.5 45.09,105.7 ; 57.05,116.11 SW6.3 57.93,114.88 ; 14.3,28.57 J11.8 ; J11.8 16.18,28.57 ; J11.8 15.24,29.52 ; D3.1 106.05,18.29 ; D3.1 105.37,17.57 ; D3.1 106.72,17.57 ; U4.1 93.6,32.7 ; U4.1 94.28,31.77 ; U4.1 92.92,31.77 ; U4.1 93.6,30.85 ; 102.93,92.2 C2.2 ; C2.2 103.5,91.64 ; C2.2 104.08,92.2 ; C68.1 105.99,56.39 ; C68.1 105.41,56.95 ; C68.1 104.83,56.39 ; J13.38 37.47,25.7 ; J13.38 38.41,24.77 ; J13.38 37.47,23.82 ; 92.25,92.97 U2.2 93.13,93.64 ; C79.2 72.75,117.01 ; C79.2 72.75,115.4 ; C79.2 72.08,116.2 ; 81.54,115.19 U6.21 78.48,112.14 ; 47.07,80.5 U10.1 ; U10.1 49.5,82.93 ; U10.1 49.5,78.07 ; U10.1 51.93,80.5 ; 88.27,32.04 J22.21 ; J22.21 87.29,33.02 ; J22.21 89.24,33.02 ; J22.21 88.27,34 ; 103.56,26.55 C47.2 ; C47.2 104.14,27.1 ; C47.2 104.14,25.99 ; C47.2 104.72,26.55 ; 42.75,127.76 C101.2 ; C101.2 43.31,128.34 ; C101.2 43.31,127.18 ; 26.67,27.64 J10.7 ; J10.7 26.67,29.52 ; J10.7 27.61,28.57 ; J10.7 25.73,28.57 ; 8.77,103.05 FF2.1 9.6,103.37 ; SW2.5 21.29,105.07 ; SW2.5 22.54,104.14 ; SW2.5 21.29,103.21 ; 95.34,106.51 U15.7 95.18,106.51 ; 119.94,78.24 FF1.1 120.77,78.56 ; J13.5 79.05,27.3 ; J13.5 78.11,28.25 ; J13.5 77.17,27.3 ; J13.5 78.11,26.36 ; C49.1 82.08,120.28 ; C49.1 80.48,120.28 ; C49.1 81.28,120.96 ; 103.5,107.16 L7.1 ; L7.1 103.5,110.01 ; L7.1 102.68,108.58 ; C48.2 83.19,121.08 ; C48.2 82.61,120.53 ; C48.2 83.76,120.53 ; U11.4 112.42,51.74 ; U11.4 111.94,50.47 ; U11.4 111.46,51.74 ; 125.73,130.04 GH6.1 ; GH6.1 123.05,132.72 ; GH6.1 125.73,135.39 ; GH6.1 128.41,132.72 ; J14.9 73.03,19.36 ; J14.9 73.03,17.48 ; J14.9 72.08,18.41 ; J14.9 73.97,18.41 ; 75.56,14.94 J14.8 ; J14.8 74.62,15.88 ; J14.8 75.56,16.82 ; J12.18 38.41,15.88 ; J12.18 37.47,16.82 ; J12.18 37.47,14.94 ; 40.01,14.94 J12.16 ; J12.16 40.95,15.88 ; J12.16 39.06,15.88 ; J12.16 40.01,16.82 ; 8.77,87.38 FF2.32 10.43,87.38 ; v1(36.83,120.65) 36.57,120.39 IC1.18 ; U8.1 93.6,16.19 ; U8.1 92.92,15.26 ; U8.1 93.6,14.34 ; U8.1 94.28,15.26 ; 34.92,17.48 J12.19 34.92,19.36 ; 121.34,43.3 C57.2 122.5,43.3 ; 118.68,34.88 U9.2 118.68,34.64 ; GH1.1 5.08,135.39 ; GH1.1 7.76,132.72 ; GH1.1 2.4,132.72 ; GH1.1 5.08,130.04 ; J9.19 18.72,69.22 ; J9.19 17.78,70.16 ; J9.19 16.84,69.22 ; C58.2 119.18,45.09 ; C58.2 118.62,45.66 ; C58.2 118.62,44.51 ; 27.61,48.9 J10.23 25.73,48.9 ; FF1.51 124.47,76.65 ; FF1.51 123.19,75.58 ; FF1.51 123.19,77.73 ; 14.3,61.59 J9.14 ; J9.14 16.18,61.59 ; J9.14 15.24,60.66 ; J9.14 15.24,62.53 ; 109.1,74.93 D5.1 108.37,74.25 ; 43.31,130.92 J24.S1 ; J24.S1 44.87,130.92 ; J24.S1 44.09,131.94 ; J24.S1 44.09,129.89 ; IC1.7 v1(43.74,117.78) ; C65.1 103.23,104.31 ; C65.1 103.23,102.7 ; C65.1 102.56,103.5 ; R49.1 85.03,120.53 ; R49.1 84.45,121.08 ; R49.1 83.88,120.53 ; 118.14,28.65 J15.3 ; J15.3 122,28.65 ; J15.3 120.07,27.48 ; J15.3 120.07,29.83 ; 73.03,14.94 J14.10 ; J14.10 73.97,15.88 ; J14.10 72.08,15.88 ; J14.10 73.03,16.82 ; v1(33.51,118.93) 34,118.44 IC1.21 ; 6.35,77.73 FF2.52 7.63,76.65 ; 24.13,25.09 J10.6 ; J10.6 25.07,26.04 ; J10.6 24.13,26.98 ; J10.6 23.19,26.04 ; 78.16,105.92 C74.2 78.74,106.48 ; 74.93,106.88 C53.2 74.35,107.44 ; 84.8,106.89 C81.2 85.09,106.88
  TOP w0.508: C66.1 v1(104.52,105.41) ; C49.1 v1(81.28,119.13) ; C4.2 v1(100.97,93.22) ; C64.1 v1(97.79,117.22) ; C79.2 v1(73.91,116.2) ; FF2.51 v1(4.24,104.96) ; v1(57.05,113.03) SW6.3 v1(55.3,114.88) ; U9.2 120.6,34.88 v1(120.65,34.92) v1(120.65,33.66) ; L7.1 v1(105.03,108.58) ; R49.1 v1(84.45,119.51) ; C101.2 v1(44.2,127.76) ; C63.1 v1(87.38,105.41) ; v1(123.19,31.75) 123.31,31.62 C67.2 v1(125.61,31.62) ; C82.1 v1(104.39,113.67) ; C84.1 v1(104.27,111.76) ; C2.2 v1(103.5,93.22) ; C37.2 v1(111.12,20.32) ; v1(90.85,93.64) U2.2 v1(92.25,94.82) ; C65.1 v1(104.52,103.5) ; C78.2 v1(115.19,106.68) ; C69.2 v1(92.08,122.81) ; C83.1 v1(91.69,111.76) ; C54.2 v1(114.94,31.75) ; FF2.52 v1(6.35,74.93) ; C102.2 v1(44.83,125.98) ; C81.2 v1(85.09,108.46) ; C77.2 v1(112.03,101.58) ; FF1.51 v1(120.6,76.65) ; C48.2 v1(83.19,119.51) ; C3.2 v1(102.23,93.22)
  GND02 w0.089: v2(65.75,66.75) 66.17,66.33 66.17,66.17 ; v2(64.75,65.75) 64.75,66.25 v2(64.25,66.75) ; v2(65.25,64.25) 65.25,63.75 v2(65.75,63.25) ; v2(65.75,64.75) 66.19,64.75 66.67,64.26 ; v2(65.75,65.25) 65.75,65.75 66.17,66.17 ; 66.17,66.17 v2(66.75,66.75) ; v2(64.25,64.75) 64.25,64.25 63.75,63.75
  GND02 w0.481: J13.26 53.65,24.77 ; J13.26 52.7,25.7 ; J13.26 51.77,24.77 ; J13.26 52.7,23.82 ; GH5.1 68.08,4.45 ; GH5.1 62.73,4.45 ; GH5.1 65.41,1.77 ; GH5.1 65.41,7.12 ; 24.13,65.73 J10.38 ; J10.38 23.19,66.67 ; J10.38 25.07,66.67 ; J10.38 24.13,67.61 ; J9.17 17.78,67.61 ; J9.17 17.78,65.73 ; J9.17 18.72,66.67 ; J9.17 16.84,66.67 ; 36.52,24.77 J13.38 ; J13.38 37.47,25.7 ; J13.38 38.41,24.77 ; J13.38 37.47,23.82 ; 25.73,28.57 J10.7 ; J10.7 27.61,28.57 ; J10.7 26.67,29.52 ; J10.7 26.67,27.64 ; J2.10 27.61,76.83 ; J2.10 26.67,75.89 ; J2.10 25.73,76.83 ; J2.10 26.67,77.78 ; U10.3 82.93,49.5 ; U10.3 80.5,51.93 ; U10.3 80.5,47.07 ; U10.3 78.07,49.5 ; 49.5,78.07 U10.1 ; U10.1 47.07,80.5 ; U10.1 49.5,82.93 ; U10.1 51.93,80.5 ; J14.9 73.97,18.41 ; J14.9 73.03,17.48 ; J14.9 72.08,18.41 ; J14.9 73.03,19.36 ; 82.21,33.02 J22.17 ; J22.17 84.16,33.02 ; J22.17 83.19,34 ; J22.17 83.19,32.04 ; 14.3,31.11 J11.10 ; J11.10 15.24,30.18 ; J11.10 16.18,31.11 ; J11.10 15.24,32.05 ; J12.14 43.48,15.88 ; J12.14 42.55,14.94 ; J12.14 42.55,16.82 ; J12.14 41.6,15.88 ; GH6.1 125.73,135.39 ; GH6.1 123.05,132.72 ; GH6.1 125.73,130.04 ; GH6.1 128.41,132.72 ; 85.72,32.04 J22.19 ; J22.19 84.75,33.02 ; J22.19 85.72,34 ; J22.19 86.7,33.02 ; 43.31,134.37 J24.S2 ; J24.S2 44.87,134.37 ; J24.S2 44.09,135.54 ; J24.S2 44.09,133.19 ; J15.2 123.57,26.18 ; J15.2 122.39,24 ; J15.2 123.57,21.82 ; J15.2 124.75,24 ; J12.20 34.92,16.82 ; J12.20 34.92,14.94 ; J12.20 35.87,15.88 ; J12.20 33.98,15.88 ; 79.7,24.77 J13.4 ; J13.4 80.64,23.82 ; J13.4 81.58,24.77 ; J13.4 80.64,25.7 ; J10.32 25.07,59.05 ; J10.32 24.13,58.12 ; J10.32 24.13,59.99 ; J10.32 23.19,59.05 ; 33.98,18.41 J12.19 ; J12.19 34.92,17.48 ; J12.19 34.92,19.36 ; J12.19 35.87,18.41 ; 49.5,47.07 U10.2 ; U10.2 49.5,51.93 ; U10.2 51.93,49.5 ; U10.2 47.07,49.5 ; 123.05,4.45 GH3.1 ; GH3.1 125.73,7.12 ; GH3.1 128.41,4.45 ; GH3.1 125.73,1.77 ; J12.17 38.41,18.41 ; J12.17 37.47,17.48 ; J12.17 36.52,18.41 ; J12.17 37.47,19.36 ; 17.78,68.28 J9.19 ; J9.19 17.78,70.16 ; J9.19 16.84,69.22 ; J9.19 18.72,69.22 ; J11.8 16.18,28.57 ; J11.8 15.24,29.52 ; J11.8 15.24,27.64 ; J11.8 14.3,28.57 ; J10.26 25.07,51.44 ; J10.26 23.19,51.44 ; J10.26 24.13,52.38 ; J10.26 24.13,50.49 ; J10.6 24.13,26.98 ; J10.6 24.13,25.09 ; J10.6 25.07,26.04 ; J10.6 23.19,26.04 ; 78.11,23.82 J13.6 ; J13.6 79.05,24.77 ; J13.6 77.17,24.77 ; J13.6 78.11,25.7 ; J9.20 16.18,69.22 ; J9.20 14.3,69.22 ; J9.20 15.24,70.16 ; J9.20 15.24,68.28 ; 118.14,28.65 J15.3 ; J15.3 120.07,29.83 ; J15.3 122,28.65 ; J15.3 120.07,27.48 ; J9.18 15.24,67.61 ; J9.18 16.18,66.67 ; J9.18 15.24,65.73 ; J9.18 14.3,66.67 ; 37.47,14.94 J12.18 ; J12.18 36.52,15.88 ; J12.18 37.47,16.82 ; J12.18 38.41,15.88 ; U10.4 82.93,80.5 ; U10.4 80.5,78.07 ; U10.4 78.07,80.5 ; U10.4 80.5,82.93 ; 26.67,47.95 J10.23 ; J10.23 25.73,48.9 ; J10.23 26.67,49.84 ; J10.23 27.61,48.9 ; J22.22 89.24,35.56 ; J22.22 88.27,34.58 ; J22.22 88.27,36.54 ; J22.22 87.29,35.56 ; 75.56,17.48 J14.7 ; J14.7 75.56,19.36 ; J14.7 76.5,18.41 ; J14.7 74.62,18.41 ; 44.11,97.79 J26.32 ; J26.32 45.09,98.77 ; J26.32 46.06,97.79 ; J26.32 45.09,96.81 ; J11.7 18.72,28.57 ; J11.7 16.84,28.57 ; J11.7 17.78,29.52 ; J11.7 17.78,27.64 ; GH2.1 7.76,4.45 ; GH2.1 2.4,4.45 ; GH2.1 5.08,1.77 ; GH2.1 5.08,7.12 ; J14.8 76.5,15.88 ; J14.8 74.62,15.88 ; J14.8 75.56,16.82 ; J14.8 75.56,14.94 ; J22.20 85.72,36.54 ; J22.20 86.7,35.56 ; J22.20 84.75,35.56 ; J22.20 85.72,34.58 ; 26.67,55.58 J10.29 ; J10.29 25.73,56.52 ; J10.29 26.67,57.45 ; J10.29 27.61,56.52 ; J14.10 73.97,15.88 ; J14.10 73.03,16.82 ; J14.10 73.03,14.94 ; J14.10 72.08,15.88 ; 77.17,27.3 J13.5 ; J13.5 78.11,28.25 ; J13.5 79.05,27.3 ; J13.5 78.11,26.36 ; J24.S3 36.89,131.94 ; J24.S3 36.11,130.92 ; J24.S3 36.89,129.89 ; J24.S3 37.67,130.92 ; 25.73,87 J2.2 ; J2.2 26.67,86.06 ; J2.2 26.67,87.94 ; J2.2 27.61,87 ; 15.24,60.66 J9.14 ; J9.14 15.24,62.53 ; J9.14 16.18,61.59 ; J9.14 14.3,61.59 ; 45.09,23.82 J13.32 ; J13.32 45.09,25.7 ; J13.32 44.15,24.77 ; J13.32 46.02,24.77 ; 62.73,132.72 GH4.1 ; GH4.1 68.08,132.72 ; GH4.1 65.41,135.39 ; GH4.1 65.41,130.04 ; 40.01,14.94 J12.16 ; J12.16 40.95,15.88 ; J12.16 39.06,15.88 ; J12.16 40.01,16.82 ; 88.27,32.04 J22.21 ; J22.21 87.29,33.02 ; J22.21 89.24,33.02 ; J22.21 88.27,34 ; 2.4,132.72 GH1.1 ; GH1.1 5.08,130.04 ; GH1.1 7.76,132.72 ; GH1.1 5.08,135.39 ; 46.69,27.3 J13.29 ; J13.29 47.62,26.36 ; J13.29 48.56,27.3 ; J13.29 47.62,28.25 ; J11.9 17.78,32.05 ; J11.9 17.78,30.18 ; J11.9 16.84,31.11 ; J11.9 18.72,31.11 ; J10.4 25.07,23.5 ; J10.4 24.13,24.43 ; J10.4 23.19,23.5 ; J10.4 24.13,22.55 ; J13.7 76.5,27.3 ; J13.7 75.56,26.36 ; J13.7 74.62,27.3 ; J13.7 75.56,28.25 ; 36.11,134.37 J24.S4 ; J24.S4 36.89,135.54 ; J24.S4 36.89,133.19 ; J24.S4 37.67,134.37 ; 47.62,99.35 J26.29 ; J26.29 46.65,100.33 ; J26.29 48.6,100.33 ; J26.29 47.62,101.31 ; J10.5 26.67,26.98 ; J10.5 27.61,26.04 ; J10.5 26.67,25.09 ; J10.5 25.73,26.04 ; J26.31 46.06,100.33 ; J26.31 45.09,101.31 ; J26.31 45.09,99.35 ; J26.31 44.11,100.33 ; 8.89,67.94 9.87,67.94 ; 8.89,67.94 7.91,67.94 ; 8.89,67.94 8.89,68.92 ; 8.89,67.94 8.89,66.97 ; 54.3,27.3 J13.23 ; J13.23 56.19,27.3 ; J13.23 55.24,26.36 ; J13.23 55.24,28.25 ; 14.3,64.14 15.24,64.14 ; 15.24,64.14 15.24,65.08 ; 15.24,64.14 15.24,63.2 ; 15.24,64.14 16.18,64.14 ; J24.S1 44.87,130.92 ; J24.S1 44.09,131.94 ; J24.S1 43.31,130.92 ; J24.S1 44.09,129.89 ; 45.09,105.7 J25.5 ; J25.5 45.09,107.66 ; J25.5 44.11,106.68 ; J25.5 46.06,106.68 ; 123.93,68.69 122.45,67.2
  GND02 w0.762: 123.19,67.94 124.3,67.94 ; 123.19,67.94 123.19,69.05 ; 123.19,67.94 122.08,67.94 ; 123.19,67.94 123.19,66.84
  ART03 w0.381: 16.84,69.22 J9.19 ; J9.19 17.78,68.28 ; J9.19 17.78,70.16 ; J9.19 18.72,69.22 ; J13.23 55.24,28.25 ; J13.23 54.3,27.3 ; J13.23 56.19,27.3 ; J13.23 55.24,26.36 ; GH4.1 65.41,135.39 ; GH4.1 68.08,132.72 ; GH4.1 65.41,130.04 ; GH4.1 62.73,132.72 ; J10.32 24.13,59.99 ; J10.32 25.07,59.05 ; J10.32 23.19,59.05 ; J10.32 24.13,58.12 ; J13.29 47.62,28.25 ; J13.29 48.56,27.3 ; J13.29 47.62,26.36 ; J13.29 46.69,27.3 ; 77.17,27.3 J13.5 ; J13.5 78.11,28.25 ; J13.5 79.05,27.3 ; J13.5 78.11,26.36 ; 36.52,15.88 J12.18 ; J12.18 37.47,14.94 ; J12.18 38.41,15.88 ; J12.18 37.47,16.82 ; GH2.1 7.76,4.45 ; GH2.1 5.08,1.77 ; GH2.1 2.4,4.45 ; GH2.1 5.08,7.12 ; 49.5,78.07 U10.1 ; U10.1 47.07,80.5 ; U10.1 49.5,82.93 ; U10.1 51.93,80.5 ; 8.89,67.94 9.87,67.94 ; 8.89,67.94 8.89,68.92 ; 8.89,67.94 7.91,67.94 ; 8.89,67.94 8.89,66.97 ; 62.73,4.45 GH5.1 ; GH5.1 65.41,1.77 ; GH5.1 68.08,4.45 ; GH5.1 65.41,7.12 ; J10.26 25.07,51.44 ; J10.26 23.19,51.44 ; J10.26 24.13,50.49 ; J10.26 24.13,52.38 ; J11.8 15.24,29.52 ; J11.8 14.3,28.57 ; J11.8 16.18,28.57 ; J11.8 15.24,27.64 ; J10.6 25.07,26.04 ; J10.6 24.13,26.98 ; J10.6 23.19,26.04 ; J10.6 24.13,25.09 ; J14.8 76.5,15.88 ; J14.8 75.56,14.94 ; J14.8 75.56,16.82 ; J14.8 74.62,15.88 ; 2.4,132.72 GH1.1 ; GH1.1 5.08,135.39 ; GH1.1 7.76,132.72 ; GH1.1 5.08,130.04 ; U10.2 51.93,49.5 ; U10.2 49.5,47.07 ; U10.2 47.07,49.5 ; U10.2 49.5,51.93 ; J13.6 78.11,25.7 ; J13.6 79.05,24.77 ; J13.6 78.11,23.82 ; J13.6 77.17,24.77 ; 44.09,129.89 J24.S1 ; J24.S1 44.09,131.94 ; J24.S1 44.87,130.92 ; J24.S1 43.31,130.92 ; 72.08,18.41 J14.9 ; J14.9 73.03,17.48 ; J14.9 73.97,18.41 ; J14.9 73.03,19.36 ; J22.17 83.19,34 ; J22.17 82.21,33.02 ; J22.17 83.19,32.04 ; J22.17 84.16,33.02 ; J13.4 80.64,25.7 ; J13.4 79.7,24.77 ; J13.4 81.58,24.77 ; J13.4 80.64,23.82 ; 51.77,24.77 J13.26 ; J13.26 53.65,24.77 ; J13.26 52.7,25.7 ; J13.26 52.7,23.82 ; J11.7 18.72,28.57 ; J11.7 17.78,29.52 ; J11.7 16.84,28.57 ; J11.7 17.78,27.64 ; 84.75,33.02 J22.19 ; J22.19 86.7,33.02 ; J22.19 85.72,32.04 ; 15.24,60.66 J9.14 ; J9.14 15.24,62.53 ; J9.14 16.18,61.59 ; J9.14 14.3,61.59 ; J24.S2 44.87,134.37 ; J24.S2 44.09,135.54 ; J24.S2 43.31,134.37 ; J24.S2 44.09,133.19 ; 33.98,15.88 J12.20 ; J12.20 35.87,15.88 ; J12.20 34.92,14.94 ; J12.20 34.92,16.82 ; J10.23 27.61,48.9 ; J10.23 25.73,48.9 ; J10.23 26.67,49.84 ; J10.23 26.67,47.95 ; J11.9 17.78,32.05 ; J11.9 18.72,31.11 ; J11.9 16.84,31.11 ; J11.9 17.78,30.18 ; J26.32 46.06,97.79 ; J26.32 45.09,98.77 ; J26.32 45.09,96.81 ; J26.32 44.11,97.79 ; GH3.1 125.73,7.12 ; GH3.1 123.05,4.45 ; GH3.1 125.73,1.77 ; GH3.1 128.41,4.45 ; J10.4 24.13,24.43 ; J10.4 24.13,22.55 ; J10.4 25.07,23.5 ; J10.4 23.19,23.5 ; J14.10 73.03,16.82 ; J14.10 73.97,15.88 ; J14.10 73.03,14.94 ; J14.10 72.08,15.88 ; 15.24,68.28 J9.20 ; J9.20 15.24,70.16 ; J9.20 14.3,69.22 ; J9.20 16.18,69.22 ; 42.55,14.94 J12.14 ; J12.14 43.48,15.88 ; J12.14 42.55,16.82 ; J12.14 41.6,15.88 ; 123.19,66.97 123.19,67.94 ; 123.19,67.94 123.19,68.92 ; 123.19,67.94 124.17,67.94 ; 123.19,67.94 122.21,67.94 ; J11.10 15.24,32.05 ; J11.10 15.24,30.18 ; J11.10 16.18,31.11 ; J11.10 14.3,31.11 ; 75.56,26.36 J13.7 ; J13.7 75.56,28.25 ; J13.7 74.62,27.3 ; J13.7 76.5,27.3 ; J9.18 15.24,67.61 ; J9.18 15.24,65.73 ; J9.18 16.18,66.67 ; J9.18 14.3,66.67 ; J10.29 27.61,56.52 ; J10.29 25.73,56.52 ; J10.29 26.67,55.58 ; J10.29 26.67,57.45 ; J13.38 38.41,24.77 ; J13.38 37.47,23.82 ; J13.38 36.52,24.77 ; J13.38 37.47,25.7 ; J24.S4 37.67,134.37 ; J24.S4 36.89,133.19 ; J24.S4 36.89,135.54 ; J24.S4 36.11,134.37 ; J14.7 76.5,18.41 ; J14.7 75.56,17.48 ; J14.7 74.62,18.41 ; J14.7 75.56,19.36 ; 125.73,130.04 GH6.1 ; GH6.1 125.73,135.39 ; GH6.1 123.05,132.72 ; GH6.1 128.41,132.72 ; 80.5,47.07 U10.3 ; U10.3 82.93,49.5 ; U10.3 78.07,49.5 ; U10.3 80.5,51.93 ; J2.10 27.61,76.83 ; J2.10 25.73,76.83 ; J2.10 26.67,75.89 ; J2.10 26.67,77.78 ; 44.15,24.77 J13.32 ; J13.32 46.02,24.77 ; J13.32 45.09,23.82 ; J13.32 45.09,25.7 ; 25.73,87 J2.2 ; J2.2 26.67,86.06 ; J2.2 26.67,87.94 ; J2.2 27.61,87 ; 47.62,99.35 J26.29 ; J26.29 48.6,100.33 ; J26.29 47.62,101.31 ; J26.29 46.65,100.33 ; 120.07,27.48 J15.3 ; J15.3 120.07,29.83 ; J15.3 118.14,28.65 ; J15.3 122,28.65 ; 24.13,65.73 J10.38 ; J10.38 25.07,66.67 ; J10.38 23.19,66.67 ; J10.38 24.13,67.61 ; 26.67,27.64 J10.7 ; J10.7 27.61,28.57 ; J10.7 25.73,28.57 ; J10.7 26.67,29.52 ; J12.19 35.87,18.41 ; J12.19 34.92,19.36 ; J12.19 34.92,17.48 ; J12.19 33.98,18.41 ; J12.17 38.41,18.41 ; J12.17 37.47,17.48 ; J12.17 36.52,18.41 ; J12.17 37.47,19.36 ; 84.75,35.56 J22.20 84.98,34.82 ; J24.S3 37.67,130.92 ; J24.S3 36.11,130.92 ; J24.S3 36.89,129.89 ; J24.S3 36.89,131.94 ; 14.3,64.14 15.24,64.14 ; 15.24,64.14 16.18,64.14 ; 15.24,64.14 15.24,65.08 ; 15.24,64.14 15.24,63.2 ; 39.06,15.88 J12.16 ; J12.16 40.95,15.88 ; J12.16 40.01,14.94 ; J12.16 40.01,16.82 ; J22.21 89.24,33.02 ; J22.21 88.27,32.04 ; J22.21 87.29,33.02 ; J10.5 27.61,26.04 ; J10.5 26.67,26.98 ; J10.5 26.67,25.09 ; J10.5 25.73,26.04 ; 17.78,65.73 J9.17 ; J9.17 18.72,66.67 ; J9.17 17.78,67.61 ; J9.17 16.84,66.67 ; 122.39,24 J15.2 ; J15.2 123.57,26.18 ; J15.2 124.75,24 ; J15.2 123.57,21.82 ; 44.11,100.33 J26.31 ; J26.31 45.09,101.31 ; J26.31 45.09,99.35 ; J26.31 46.06,100.33 ; J25.5 45.09,107.66 ; J25.5 44.11,106.68 ; J25.5 46.06,106.68
  ART04 w0.381: 23.19,59.05 J10.32 ; J10.32 25.07,59.05 ; J10.32 24.13,58.12 ; J10.32 24.13,59.99 ; 46.69,27.3 J13.29 ; J13.29 47.62,28.25 ; J13.29 47.62,26.36 ; J13.29 48.56,27.3 ; 87.29,33.02 J22.21 ; J22.21 88.27,34 ; J22.21 88.27,32.04 ; J22.21 89.24,33.02 ; J10.26 24.13,52.38 ; J10.26 23.19,51.44 ; J10.26 25.07,51.44 ; J10.26 24.13,50.49 ; J22.17 84.16,33.02 ; J22.17 83.19,34 ; J22.17 83.19,32.04 ; J22.17 82.21,33.02 ; J14.7 75.56,19.36 ; J14.7 74.62,18.41 ; J14.7 76.5,18.41 ; J14.7 75.56,17.48 ; 33.98,15.88 J12.20 ; J12.20 35.87,15.88 ; J12.20 34.92,16.82 ; J12.20 34.92,14.94 ; 79.7,24.77 J13.4 ; J13.4 80.64,23.82 ; J13.4 80.64,25.7 ; J13.4 81.58,24.77 ; GH6.1 128.41,132.72 ; GH6.1 125.73,130.04 ; GH6.1 125.73,135.39 ; GH6.1 123.05,132.72 ; J13.26 53.65,24.77 ; J13.26 52.7,25.7 ; J13.26 52.7,23.82 ; J13.26 51.77,24.77 ; J10.38 25.07,66.67 ; J10.38 24.13,67.61 ; J10.38 23.19,66.67 ; J10.38 24.13,65.73 ; J13.5 78.11,28.25 ; J13.5 79.05,27.3 ; J13.5 77.17,27.3 ; J13.5 78.11,26.36 ; 44.09,133.19 J24.S2 ; J24.S2 44.09,135.54 ; J24.S2 44.87,134.37 ; J24.S2 43.31,134.37 ; 88.27,34.58 J22.22 ; J22.22 87.29,35.56 ; J22.22 88.27,36.54 ; J22.22 89.24,35.56 ; 14.3,61.59 J9.14 ; J9.14 15.24,62.53 ; J9.14 15.24,60.66 ; J9.14 16.18,61.59 ; J9.18 15.24,67.61 ; J9.18 14.3,66.67 ; J9.18 16.18,66.67 ; J9.18 15.24,65.73 ; 34.92,17.48 J12.19 ; J12.19 33.98,18.41 ; J12.19 35.87,18.41 ; J12.19 34.92,19.36 ; J15.3 120.07,29.83 ; J15.3 122,28.65 ; J15.3 118.14,28.65 ; J15.3 120.07,27.48 ; 8.89,67.94 8.89,68.92 ; 8.89,67.94 9.87,67.94 ; 8.89,67.94 7.91,67.94 ; 8.89,67.94 8.89,66.97 ; J12.14 42.55,16.82 ; J12.14 41.6,15.88 ; J12.14 42.55,14.94 ; J12.14 43.48,15.88 ; 17.78,30.18 J11.9 ; J11.9 18.72,31.11 ; J11.9 17.78,32.05 ; J11.9 16.84,31.11 ; 5.08,1.77 GH2.1 ; GH2.1 5.08,7.12 ; GH2.1 7.76,4.45 ; GH2.1 2.4,4.45 ; J12.17 38.41,18.41 ; J12.17 37.47,19.36 ; J12.17 36.52,18.41 ; J12.17 37.47,17.48 ; J13.7 76.5,27.3 ; J13.7 75.56,26.36 ; J13.7 74.62,27.3 ; J13.7 75.56,28.25 ; 14.3,69.22 J9.20 ; J9.20 16.18,69.22 ; J9.20 15.24,70.16 ; J9.20 15.24,68.28 ; GH1.1 7.76,132.72 ; GH1.1 2.4,132.72 ; GH1.1 5.08,135.39 ; GH1.1 5.08,130.04 ; 26.67,47.95 J10.23 ; J10.23 26.67,49.84 ; J10.23 25.73,48.9 ; J10.23 27.61,48.9 ; J11.7 17.78,29.52 ; J11.7 17.78,27.64 ; J11.7 18.72,28.57 ; J11.7 16.84,28.57 ; 23.19,23.5 J10.4 ; J10.4 25.07,23.5 ; J10.4 24.13,24.43 ; J10.4 24.13,22.55 ; J24.S4 37.67,134.37 ; J24.S4 36.89,133.19 ; J24.S4 36.11,134.37 ; J24.S4 36.89,135.54 ; 123.57,21.82 J15.2 ; J15.2 124.75,24 ; J15.2 122.39,24 ; J15.2 123.57,26.18 ; 15.24,63.2 15.24,64.14 ; 15.24,64.14 15.24,65.08 ; 15.24,64.14 16.18,64.14 ; 15.24,64.14 14.3,64.14 ; 85.72,34.58 J22.20 ; J22.20 84.75,35.56 ; J22.20 86.7,35.56 ; J22.20 85.72,36.54 ; 73.03,17.48 J14.9 ; J14.9 72.08,18.41 ; J14.9 73.03,19.36 ; J14.9 73.97,18.41 ; J10.6 25.07,26.04 ; J10.6 24.13,26.98 ; J10.6 23.19,26.04 ; J10.6 24.13,25.09 ; J9.17 17.78,67.61 ; J9.17 18.72,66.67 ; J9.17 17.78,65.73 ; J9.17 16.84,66.67 ; J14.10 73.03,16.82 ; J14.10 73.03,14.94 ; J14.10 72.08,15.88 ; J14.10 73.97,15.88 ; J24.S3 36.89,131.94 ; J24.S3 37.67,130.92 ; J24.S3 36.89,129.89 ; J24.S3 36.11,130.92 ; 55.24,26.36 J13.23 ; J13.23 54.3,27.3 ; J13.23 55.24,28.25 ; J13.23 56.19,27.3 ; J24.S1 44.87,130.92 ; J24.S1 43.31,130.92 ; J24.S1 44.09,131.94 ; J24.S1 44.09,129.89 ; 84.75,33.02 J22.19 ; J22.19 85.72,32.04 ; J22.19 86.7,33.02 ; J22.19 85.72,34 ; 37.47,14.94 J12.18 ; J12.18 37.47,16.82 ; J12.18 38.41,15.88 ; J12.18 36.52,15.88 ; GH5.1 65.41,7.12 ; GH5.1 65.41,1.77 ; GH5.1 62.73,4.45 ; GH5.1 68.08,4.45 ; 14.3,28.57 J11.8 ; J11.8 16.18,28.57 ; J11.8 15.24,27.64 ; J11.8 15.24,29.52 ; 25.73,26.04 J10.5 ; J10.5 27.61,26.04 ; J10.5 26.67,25.09 ; J10.5 26.67,26.98 ; 25.73,76.83 J2.10 ; J2.10 26.67,75.89 ; J2.10 26.67,77.78 ; J2.10 27.61,76.83 ; 45.09,23.82 J13.32 ; J13.32 46.02,24.77 ; J13.32 44.15,24.77 ; J13.32 45.09,25.7 ; J11.10 15.24,32.05 ; J11.10 14.3,31.11 ; J11.10 15.24,30.18 ; J11.10 16.18,31.11 ; 123.19,66.97 123.19,67.94 ; 123.19,67.94 124.17,67.94 ; 123.19,67.94 122.21,67.94 ; 123.19,67.94 123.19,68.92 ; J14.8 75.56,16.82 ; J14.8 75.56,14.94 ; J14.8 76.5,15.88 ; J14.8 74.62,15.88 ; 16.84,69.22 J9.19 ; J9.19 18.72,69.22 ; J9.19 17.78,68.28 ; J9.19 17.78,70.16 ; 26.67,55.58 J10.29 ; J10.29 25.73,56.52 ; J10.29 26.67,57.45 ; J10.29 27.61,56.52 ; J13.38 37.47,25.7 ; J13.38 38.41,24.77 ; J13.38 36.52,24.77 ; J13.38 37.47,23.82 ; 80.5,78.07 U10.4 ; U10.4 78.07,80.5 ; U10.4 80.5,82.93 ; U10.4 82.93,80.5 ; 39.06,15.88 J12.16 ; J12.16 40.01,14.94 ; J12.16 40.01,16.82 ; J12.16 40.95,15.88 ; 125.73,1.77 GH3.1 ; GH3.1 123.05,4.45 ; GH3.1 128.41,4.45 ; GH3.1 125.73,7.12 ; J13.6 79.05,24.77 ; J13.6 78.11,23.82 ; J13.6 78.11,25.7 ; J13.6 77.17,24.77 ; 26.67,27.64 J10.7 ; J10.7 26.67,29.52 ; J10.7 27.61,28.57 ; J10.7 25.73,28.57 ; GH4.1 65.41,135.39 ; GH4.1 68.08,132.72 ; GH4.1 62.73,132.72 ; GH4.1 65.41,130.04
  GND05 w0.381: J11.9 17.78,32.05 ; J11.9 17.78,30.18 ; J11.9 18.72,31.11 ; J11.9 16.84,31.11 ; J12.18 38.41,15.88 ; J12.18 36.52,15.88 ; J12.18 37.47,16.82 ; J12.18 37.47,14.94 ; J22.20 85.72,36.54 ; J22.20 86.7,35.56 ; J22.20 84.75,35.56 ; J22.20 85.72,34.58 ; J9.18 15.24,67.61 ; J9.18 14.3,66.67 ; J9.18 15.24,65.73 ; J9.18 16.18,66.67 ; J13.38 38.41,24.77 ; J13.38 37.47,23.82 ; J13.38 37.47,25.7 ; J13.38 36.52,24.77 ; U10.2 49.5,51.93 ; U10.2 47.07,49.5 ; U10.2 51.93,49.5 ; U10.2 49.5,47.07 ; 82.21,33.02 J22.17 ; J22.17 83.19,34 ; J22.17 84.16,33.02 ; J22.17 83.19,32.04 ; J13.32 46.02,24.77 ; J13.32 45.09,25.7 ; J13.32 44.15,24.77 ; J13.32 45.09,23.82 ; 120.07,27.48 J15.3 ; J15.3 120.07,29.83 ; J15.3 118.14,28.65 ; J15.3 122,28.65 ; J9.17 18.72,66.67 ; J9.17 17.78,67.61 ; J9.17 17.78,65.73 ; J9.17 16.84,66.67 ; 88.27,32.04 J22.21 ; J22.21 88.27,34 ; J22.21 89.24,33.02 ; J22.21 87.29,33.02 ; J24.S2 44.09,135.54 ; J24.S2 43.31,134.37 ; J24.S2 44.87,134.37 ; J24.S2 44.09,133.19 ; J2.2 26.67,87.94 ; J2.2 25.73,87 ; J2.2 26.67,86.06 ; J2.2 27.61,87 ; GH5.1 68.08,4.45 ; GH5.1 65.41,1.77 ; GH5.1 62.73,4.45 ; GH5.1 65.41,7.12 ; J12.14 43.48,15.88 ; J12.14 42.55,16.82 ; J12.14 42.55,14.94 ; J12.14 41.6,15.88 ; 87.29,35.56 J22.22 ; J22.22 88.27,36.54 ; J22.22 89.24,35.56 ; J22.22 88.27,34.58 ; 8.15,67.2 9.63,68.69 ; 23.19,51.44 J10.26 ; J10.26 24.13,52.38 ; J10.26 25.07,51.44 ; J10.26 24.13,50.49 ; J24.S1 44.09,131.94 ; J24.S1 44.09,129.89 ; J24.S1 44.87,130.92 ; J24.S1 43.31,130.92 ; 75.56,26.36 J13.7 ; J13.7 76.5,27.3 ; J13.7 75.56,28.25 ; J13.7 74.62,27.3 ; 39.06,15.88 J12.16 ; J12.16 40.01,14.94 ; J12.16 40.01,16.82 ; J12.16 40.95,15.88 ; 16.84,28.57 J11.7 ; J11.7 17.78,29.52 ; J11.7 18.72,28.57 ; J11.7 17.78,27.64 ; J26.32 45.09,98.77 ; J26.32 44.11,97.79 ; J26.32 46.06,97.79 ; J26.32 45.09,96.81 ; 24.13,65.73 J10.38 ; J10.38 23.19,66.67 ; J10.38 25.07,66.67 ; J10.38 24.13,67.61 ; GH3.1 128.41,4.45 ; GH3.1 125.73,1.77 ; GH3.1 123.05,4.45 ; GH3.1 125.73,7.12 ; U10.1 49.5,82.93 ; U10.1 51.93,80.5 ; U10.1 47.07,80.5 ; U10.1 49.5,78.07 ; J9.20 15.24,70.16 ; J9.20 16.18,69.22 ; J9.20 15.24,68.28 ; J9.20 14.3,69.22 ; 80.5,78.07 U10.4 ; U10.4 80.5,82.93 ; U10.4 82.93,80.5 ; U10.4 78.07,80.5 ; J9.19 17.78,70.16 ; J9.19 17.78,68.28 ; J9.19 16.84,69.22 ; J9.19 18.72,69.22 ; J14.9 73.03,19.36 ; J14.9 73.97,18.41 ; J14.9 72.08,18.41 ; J14.9 73.03,17.48 ; J14.10 73.03,16.82 ; J14.10 72.08,15.88 ; J14.10 73.03,14.94 ; J14.10 73.97,15.88 ; J11.10 16.18,31.11 ; J11.10 14.3,31.11 ; J11.10 15.24,32.05 ; J11.10 15.24,30.18 ; 123.57,21.82 J15.2 ; J15.2 124.75,24 ; J15.2 122.39,24 ; J15.2 123.57,26.18 ; 34.92,14.94 J12.20 ; J12.20 33.98,15.88 ; J12.20 35.87,15.88 ; J12.20 34.92,16.82 ; J2.10 27.61,76.83 ; J2.10 25.73,76.83 ; J2.10 26.67,77.78 ; J2.10 26.67,75.89 ; J24.S4 36.89,135.54 ; J24.S4 36.89,133.19 ; J24.S4 37.67,134.37 ; J24.S4 36.11,134.37 ; 23.19,26.04 J10.6 ; J10.6 24.13,26.98 ; J10.6 25.07,26.04 ; J10.6 24.13,25.09 ; 125.73,130.04 GH6.1 ; GH6.1 123.05,132.72 ; GH6.1 128.41,132.72 ; GH6.1 125.73,135.39 ; J13.23 55.24,28.25 ; J13.23 56.19,27.3 ; J13.23 54.3,27.3 ; J13.23 55.24,26.36 ; J13.29 47.62,28.25 ; J13.29 46.69,27.3 ; J13.29 48.56,27.3 ; J13.29 47.62,26.36 ; 26.67,55.58 J10.29 ; J10.29 27.61,56.52 ; J10.29 26.67,57.45 ; J10.29 25.73,56.52 ; 75.56,14.94 J14.8 ; J14.8 74.62,15.88 ; J14.8 75.56,16.82 ; J14.8 76.5,15.88 ; 15.24,64.14 15.24,65.08 ; 15.24,64.14 14.3,64.14 ; 15.24,64.14 15.24,63.2 ; 15.24,64.14 16.18,64.14 ; 33.98,18.41 J12.19 ; J12.19 34.92,17.48 ; J12.19 34.92,19.36 ; J12.19 35.87,18.41 ; 45.09,99.35 J26.31 ; J26.31 44.11,100.33 ; J26.31 45.09,101.31 ; J26.31 46.06,100.33 ; GH4.1 68.08,132.72 ; GH4.1 65.41,135.39 ; GH4.1 65.41,130.04 ; GH4.1 62.73,132.72 ; J25.5 46.06,106.68 ; J25.5 44.11,106.68 ; J25.5 45.09,105.7 ; J25.5 45.09,107.66 ; 26.67,47.95 J10.23 ; J10.23 26.67,49.84 ; J10.23 25.73,48.9 ; J10.23 27.61,48.9 ; 46.65,100.33 J26.29 ; J26.29 48.6,100.33 ; J26.29 47.62,99.35 ; J26.29 47.62,101.31 ; 14.3,28.57 J11.8 ; J11.8 15.24,27.64 ; J11.8 15.24,29.52 ; J11.8 16.18,28.57 ; J9.14 15.24,62.53 ; J9.14 14.3,61.59 ; J9.14 15.24,60.66 ; J9.14 16.18,61.59 ; U10.3 82.93,49.5 ; U10.3 78.07,49.5 ; U10.3 80.5,51.93 ; U10.3 80.5,47.07 ; J10.7 26.67,29.52 ; J10.7 25.73,28.57 ; J10.7 27.61,28.57 ; J10.7 26.67,27.64 ; J13.5 78.11,28.25 ; J13.5 77.17,27.3 ; J13.5 78.11,26.36 ; J13.5 79.05,27.3 ; GH2.1 7.76,4.45 ; GH2.1 5.08,7.12 ; GH2.1 5.08,1.77 ; GH2.1 2.4,4.45 ; 2.4,132.72 GH1.1 ; GH1.1 5.08,135.39 ; GH1.1 7.76,132.72 ; GH1.1 5.08,130.04 ; J10.4 24.13,24.43 ; J10.4 23.19,23.5 ; J10.4 25.07,23.5 ; J10.4 24.13,22.55 ; J12.17 37.47,19.36 ; J12.17 38.41,18.41 ; J12.17 37.47,17.48 ; J12.17 36.52,18.41 ; J24.S3 36.89,131.94 ; J24.S3 36.11,130.92 ; J24.S3 37.67,130.92 ; J24.S3 36.89,129.89 ; 78.11,23.82 J13.6 ; J13.6 77.17,24.77 ; J13.6 79.05,24.77 ; J13.6 78.11,25.7 ; 24.13,58.12 J10.32 ; J10.32 24.13,59.99 ; J10.32 25.07,59.05 ; J10.32 23.19,59.05 ; 52.7,23.82 J13.26 ; J13.26 52.7,25.7 ; J13.26 51.77,24.77 ; J13.26 53.65,24.77 ; 25.73,26.04 J10.5 ; J10.5 27.61,26.04 ; J10.5 26.67,25.09 ; J10.5 26.67,26.98 ; 84.75,33.02 J22.19 ; J22.19 85.72,32.04 ; J22.19 86.7,33.02 ; J22.19 85.72,34 ; 123.19,67.94 123.19,68.92 ; 123.19,67.94 123.19,66.97 ; 123.19,67.94 124.17,67.94 ; 123.19,67.94 122.21,67.94 ; 75.56,17.48 J14.7 ; J14.7 76.5,18.41 ; J14.7 74.62,18.41 ; J14.7 75.56,19.36 ; J13.4 80.64,25.7 ; J13.4 81.58,24.77 ; J13.4 80.64,23.82 ; J13.4 79.7,24.77
  GND05 w0.762: 8.89,69.05 8.89,67.94 ; 8.89,67.94 10,67.94 ; 8.89,67.94 7.78,67.94 ; 8.89,67.94 8.89,66.84
  BOTTOM w0.254: C18.2 v1(66.67,73.41) ; C92.2 v2(56.26,62.87) ; C85.2 v2(62.87,56.9) ; C21.2 v2(65.41,56.9) ; C24.2 63.25,67.05 63.25,66.75 v2(63.25,66.75) ; C93.2 v2(73.41,65.41) ; C87.2 v2(73.41,66.67) ; 62.23,64.89 62.88,64.25 v2(63.25,64.25) ; C94.2 v2(73.41,64.14) ; C16.2 v1(65.41,73.41) ; C7.2 v2(60.33,56.9) ; v2(56.26,70.48) C90.2 ; F11.1 v1(64.14,73.41) ; C8.2 v1(69.22,73.41) ; C22.2 v2(67.94,56.9) ; C88.2 v2(73.41,67.94) ; C12.2 v2(73.41,62.87) ; C27.2 v2(56.26,67.94) ; C5.2 v2(61.59,56.9) ; C11.2 v2(73.41,61.59) ; C86.2 v2(64.14,56.9) ; C26.2 v2(56.26,60.33) ; C15.2 v1(61.59,73.41) ; C23.2 v2(69.22,56.9) ; C91.2 v2(56.26,69.22) ; C10.2 v1(67.94,73.41) ; C25.2 v2(56.26,61.59) ; C89.2 v2(73.41,69.22) ; C13.2 v1(62.87,73.41) ; C19.2 v2(66.67,56.9) ; C6.2 v2(73.41,60.33)
  BOTTOM w0.381: GH6.1 128.41,132.72 ; GH6.1 123.05,132.72 ; GH6.1 125.73,130.04 ; GH6.1 125.73,135.39 ; 16.84,31.11 J11.9 ; J11.9 17.78,30.18 ; J11.9 18.72,31.11 ; J11.9 17.78,32.05 ; U10.2 49.5,51.93 ; U10.2 49.5,47.07 ; U10.2 47.07,49.5 ; U10.2 51.93,49.5 ; 78.07,49.5 U10.3 ; U10.3 80.5,51.93 ; U10.3 80.5,47.07 ; U10.3 82.93,49.5 ; 5.08,1.77 GH2.1 ; GH2.1 5.08,7.12 ; GH2.1 2.4,4.45 ; GH2.1 7.76,4.45 ; J10.6 25.07,26.04 ; J10.6 24.13,26.98 ; J10.6 23.19,26.04 ; 25.73,76.83 J2.10 ; J2.10 26.67,77.78 ; J2.10 27.61,76.83 ; J2.10 26.67,75.89 ; 72.52,67.37 C88.2 ; C88.2 72.52,68.52 ; C88.2 71.96,67.94 ; 71.96,65.41 C93.2 ; C93.2 72.52,65.98 ; C93.2 72.52,64.83 ; J26.29 47.62,101.31 ; J26.29 48.6,100.33 ; J26.29 47.62,99.35 ; 41.6,15.88 J12.14 ; J12.14 42.55,16.82 ; J12.14 43.48,15.88 ; J12.14 42.55,14.94 ; 62.73,132.72 GH4.1 ; GH4.1 68.08,132.72 ; GH4.1 65.41,130.04 ; GH4.1 65.41,135.39 ; 16.84,28.57 J11.7 ; J11.7 17.78,27.64 ; J11.7 17.78,29.52 ; J11.7 18.72,28.57 ; 80.5,78.07 U10.4 ; U10.4 80.5,82.93 ; U10.4 82.93,80.5 ; U10.4 78.07,80.5 ; J13.32 46.02,24.77 ; J13.32 45.09,25.7 ; J13.32 45.09,23.82 ; 5.08,130.04 GH1.1 ; GH1.1 5.08,135.39 ; GH1.1 2.4,132.72 ; GH1.1 7.76,132.72 ; 61.65,64.89 62.23,64.89 ; 62.23,64.89 62.23,64.34 ; 62.23,64.89 62.23,65.45 ; C26.2 57.02,60.9 ; C26.2 57.58,60.33 ; C26.2 57.02,59.75 ; 33.98,15.88 J12.20 ; J12.20 34.92,14.94 ; J12.20 35.87,15.88 ; J12.20 34.92,16.82 ; C10.2 68.52,72.52 ; C10.2 67.94,71.96 ; C10.2 67.37,72.52 ; 24.13,58.12 J10.32 ; J10.32 23.19,59.05 ; J10.32 25.07,59.05 ; C21.2 65.41,58.22 ; C21.2 64.83,57.66 ; C21.2 65.98,57.66 ; 57.02,67.37 C27.2 ; C27.2 57.02,68.52 ; C27.2 57.58,67.94 ; J10.23 26.67,49.84 ; J10.23 26.67,47.95 ; J10.23 25.73,48.9 ; J10.23 27.61,48.9 ; J22.21 88.27,34 ; J22.21 88.27,32.04 ; J22.21 87.29,33.02 ; 15.24,30.18 J11.10 ; J11.10 16.18,31.11 ; J11.10 14.3,31.11 ; J11.10 15.24,32.05 ; 15.24,63.2 15.24,64.14 ; 15.24,64.14 16.18,64.14 ; 15.24,64.14 15.24,65.08 ; 15.24,64.14 14.3,64.14 ; J24.S3 37.67,130.92 ; J24.S3 36.11,130.92 ; J24.S3 36.89,129.89 ; J24.S3 36.89,131.94 ; J14.7 76.5,18.41 ; J14.7 74.62,18.41 ; J14.7 75.56,19.36 ; J14.7 75.56,17.48 ; J9.19 18.72,69.22 ; J9.19 16.84,69.22 ; J9.19 17.78,68.28 ; J9.19 17.78,70.16 ; J2.2 27.61,87 ; J2.2 25.73,87 ; J2.2 26.67,87.94 ; C11.2 72.52,62.17 ; C11.2 71.96,61.59 ; C11.2 72.52,61.02 ; J24.S4 37.67,134.37 ; J24.S4 36.11,134.37 ; J24.S4 36.89,133.19 ; J24.S4 36.89,135.54 ; J13.6 78.11,25.7 ; J13.6 77.17,24.77 ; J13.6 78.11,23.82 ; 17.78,65.73 J9.17 ; J9.17 16.84,66.67 ; J9.17 17.78,67.61 ; J9.17 18.72,66.67 ; J24.S1 44.09,131.94 ; J24.S1 43.31,130.92 ; J24.S1 44.87,130.92 ; J24.S1 44.09,129.89 ; 36.52,15.88 J12.18 ; J12.18 38.41,15.88 ; J12.18 37.47,14.94 ; J12.18 37.47,16.82 ; 122.21,67.94 123.19,67.94 ; 123.19,67.94 124.17,67.94 ; 123.19,67.94 123.19,68.92 ; 123.19,67.94 123.19,66.97 ; 45.09,96.81 J26.32 ; J26.32 45.09,98.77 ; J26.32 44.11,97.79 ; C87.2 72.52,67.25 ; C87.2 72.52,66.1 ; C87.2 71.96,66.67 ; 72.08,18.41 J14.9 ; J14.9 73.03,17.48 ; J14.9 73.97,18.41 ; J14.9 73.03,19.36 ; 59.75,57.66 C7.2 ; C7.2 60.9,57.66 ; C7.2 60.33,58.22 ; GH5.1 68.08,4.45 ; GH5.1 62.73,4.45 ; GH5.1 65.41,1.77 ; GH5.1 65.41,7.12 ; 87.29,35.56 J22.22 ; J22.22 88.27,36.54 ; J22.22 88.27,34.58 ; 57.02,68.64 C91.2 ; C91.2 57.58,69.22 ; C91.2 57.02,69.79 ; 123.57,21.82 J15.2 ; J15.2 123.57,26.18 ; J15.2 122.39,24 ; J15.2 124.75,24 ; C18.2 67.25,72.52 ; C18.2 66.1,72.52 ; C18.2 66.67,71.96 ; 15.24,68.28 J9.20 ; J9.20 14.3,69.22 ; J9.20 15.24,70.16 ; J9.20 16.18,69.22 ; C25.2 57.58,61.59 ; C25.2 57.02,62.17 ; C25.2 57.02,61.02 ; 62.23,67.51 C24.2 ; C24.2 62.81,68.07 ; C24.2 61.65,68.07 ; C24.2 62.23,68.63 ; J22.19 86.7,33.02 ; J22.19 85.72,32.04 ; J22.19 84.75,33.02 ; J22.19 85.72,34 ; J9.14 16.18,61.59 ; J9.14 14.3,61.59 ; J9.14 15.24,62.53 ; J9.14 15.24,60.66 ; C5.2 62.17,57.66 ; C5.2 61.02,57.66 ; C5.2 61.59,58.22 ; 125.73,1.77 GH3.1 ; GH3.1 123.05,4.45 ; GH3.1 128.41,4.45 ; GH3.1 125.73,7.12 ; J13.26 52.7,25.7 ; J13.26 51.77,24.77 ; J13.26 52.7,23.82 ; J13.26 53.65,24.77 ; 45.09,99.35 J26.31 ; J26.31 44.11,100.33 ; J26.31 45.09,101.31 ; J15.3 120.07,29.83 ; J15.3 122,28.65 ; J15.3 120.07,27.48 ; J15.3 118.14,28.65 ; J14.8 75.56,16.82 ; J14.8 74.62,15.88 ; J14.8 76.5,15.88 ; J14.8 75.56,14.94 ; 34.92,17.48 J12.19 ; J12.19 33.98,18.41 ; J12.19 34.92,19.36 ; J12.19 35.87,18.41 ; J22.20 86.7,35.56 ; J22.20 85.72,34.58 ; J22.20 85.72,36.54 ; J22.20 84.75,35.56 ; J11.8 15.24,29.52 ; J11.8 14.3,28.57 ; J11.8 15.24,27.64 ; J11.8 16.18,28.57 ; 23.19,51.44 J10.26 ; J10.26 24.13,50.49 ; J10.26 24.13,52.38 ; J10.26 25.07,51.44 ; J10.7 27.61,28.57 ; J10.7 26.67,27.64 ; J10.7 25.73,28.57 ; 62.29,72.52 C13.2 ; C13.2 63.44,72.52 ; C13.2 62.87,71.96 ; J10.5 27.61,26.04 ; J10.5 26.67,25.09 ; J10.5 25.73,26.04 ; J10.5 26.67,26.98 ; J10.38 25.07,66.67 ; J10.38 24.13,65.73 ; J10.38 23.19,66.67 ; J10.38 24.13,67.61 ; 61.59,71.96 C15.2 ; C15.2 62.17,72.52 ; C15.2 61.02,72.52 ; J24.S2 44.87,134.37 ; J24.S2 43.31,134.37 ; J24.S2 44.09,133.19 ; J24.S2 44.09,135.54 ; 72.52,62.29 C12.2 ; C12.2 72.52,63.44 ; C12.2 71.96,62.87 ; J25.5 45.09,107.66 ; J25.5 44.11,106.68 ; J25.5 45.09,105.7 ; J25.5 46.06,106.68 ; 75.56,26.36 J13.7 ; J13.7 76.5,27.3 ; J13.7 75.56,28.25 ; J22.17 84.16,33.02 ; J22.17 83.19,34 ; J22.17 83.19,32.04 ; J22.17 82.21,33.02 ; C19.2 67.25,57.66 ; C19.2 66.1,57.66 ; C19.2 66.67,58.22 ; 69.22,58.22 C23.2 68.64,57.66 ; 57.02,69.91 C90.2 ; C90.2 57.02,71.06 ; C90.2 57.58,70.48 ; 77.17,27.3 J13.5 ; J13.5 78.11,28.25 ; J13.5 78.11,26.36 ; J13.5 79.05,27.3 ; J12.16 40.01,16.82 ; J12.16 40.01,14.94 ; J12.16 39.06,15.88 ; J12.16 40.95,15.88 ; C22.2 68.52,57.66 ; C22.2 67.94,58.22 ; C22.2 67.37,57.66 ; J13.29 47.62,28.25 ; J13.29 47.62,26.36 ; J13.29 46.69,27.3 ; J13.29 48.56,27.3 ; 37.47,23.82 J13.38 ; J13.38 38.41,24.77 ; J13.38 37.47,25.7 ; J13.38 36.52,24.77 ; J12.17 37.47,19.36 ; J12.17 38.41,18.41 ; J12.17 37.47,17.48 ; J12.17 36.52,18.41 ; C89.2 72.52,69.79 ; C89.2 71.96,69.22 ; C89.2 72.52,68.64 ; C85.2 63.44,57.66 ; C85.2 62.29,57.66 ; C85.2 62.87,58.22 ; 73.03,14.94 J14.10 ; J14.10 73.97,15.88 ; J14.10 73.03,16.82 ; J14.10 72.08,15.88 ; J10.29 27.61,56.52 ; J10.29 25.73,56.52 ; J10.29 26.67,57.45 ; J10.29 26.67,55.58 ; 7.91,67.94 8.89,67.94 ; 8.89,67.94 8.89,68.92 ; 8.89,67.94 8.89,66.97 ; 71.96,64.14 C94.2 ; C94.2 72.52,64.71 ; C94.2 72.52,63.56 ; 15.24,65.73 J9.18 ; J9.18 15.24,67.61 ; J9.18 16.18,66.67 ; J9.18 14.3,66.67 ; U10.1 49.5,82.93 ; U10.1 49.5,78.07 ; U10.1 47.07,80.5 ; U10.1 51.93,80.5 ; 55.24,26.36 J13.23 ; J13.23 54.3,27.3 ; J13.23 55.24,28.25 ; J13.23 56.19,27.3 ; C86.2 64.14,58.22 ; C86.2 64.71,57.66 ; C86.2 63.56,57.66 ; 71.96,60.33 C6.2 ; C6.2 72.52,59.75 ; C6.2 72.52,60.9 ; 64.14,71.89 F11.1 ; F11.1 63.53,72.36 ; F11.1 64.74,72.36 ; 64.83,72.52 C16.2 ; C16.2 65.98,72.52 ; C16.2 65.41,71.96 ; C92.2 57.02,63.44 ; C92.2 57.02,62.29 ; C92.2 57.58,62.87 ; 68.64,72.52 C8.2 ; C8.2 69.79,72.52 ; C8.2 69.22,71.96 ; 80.64,25.7 J13.4 80.64,23.82 ; 23.19,23.5 J10.4 25.07,23.5
  vias: v1(0.8,132.93) v1(0.8,129.12) v1(0.8,125.31) v1(0.8,121.5) v1(0.8,117.69) v1(0.8,113.88) v1(0.8,110.07) v1(0.8,106.26) v1(0.8,102.45) v1(0.8,98.64) v1(0.8,94.83) v1(0.8,91.02) v1(0.8,87.21) v1(0.8,83.4) v1(0.8,79.59) v1(0.8,75.78) v1(0.8,71.97) v1(0.8,68.16) v1(0.8,64.35) v1(0.8,60.54) v1(0.8,56.73) v1(0.8,52.92) v1(0.8,49.11) v1(0.8,45.3) v1(0.8,41.49) v1(0.8,37.68) v1(0.8,33.87) v1(0.8,30.06) v1(0.8,26.25) v1(0.8,22.44) v1(0.8,18.63) v1(0.8,14.82) v1(0.8,11.01) v1(0.8,7.2) v1(0.8,3.39) v1(1.63,135.68) v1(2.27,0.96) v1(6.08,0.96) v1(7.34,135.68) v1(9.89,0.96) v1(10.52,135.68) v1(12.19,115.44) v1(12.19,100.08) v1(12.7,101.6) v1(13.08,103.12) v1(13.34,96.77) v1(13.7,0.96) v1(13.97,73.41) v1(14.33,135.68) v1(14.35,113.28) v1(16.13,77.98) v1(16.13,75.18) v1(17.14,73.41) v1(17.51,0.96) v1(18.14,135.68) v1(20.45,80.64) v1(21.21,77.6) v1(21.32,0.96) v1(21.95,135.68) v1(25.13,0.96) v1(25.76,135.68) v1(28.94,0.96) v1(29.57,135.68) v1(32.75,0.96) v1(33.38,135.68) v1(36.56,0.96) v1(40.37,0.96) v1(44.18,0.96) v1(45.09,113.67) v1(47.99,0.96) v1(48.62,135.68) v1(51.8,0.96) v1(52.43,135.68) v1(55.61,0.96) v1(56.24,135.68) v1(59.42,0.96) v1(60.05,135.68) v1(63.23,0.96) v1(63.86,135.68) v1(67.04,0.96) v1(67.67,135.68) v1(70.85,0.96) v1(71.48,135.68) v1(74.66,0.96) v1(75.29,135.68) v1(78.47,0.96) v1(79.1,135.68) v1(79.25,114.43) v1(79.25,112.9) v1(80.77,114.43) v1(82.28,0.96) v1(82.91,135.68) v1(83.06,12.06) v1(83.06,10.92) v1(83.06,9.78) v1(84.2,12.06) v1(84.2,10.92) v1(84.2,9.78) v1(86.09,0.96) v1(86.72,135.68) v1(89.9,0.96) v1(90.53,135.68) v1(91.95,31.75) v1(91.95,30.35) v1(91.95,15.24) v1(91.95,13.84) v1(92.71,25.15) v1(92.71,8.26) v1(92.96,30.35) v1(92.96,13.84) v1(93.71,0.96) v1(94.11,30.35) v1(94.11,13.84) v1(94.34,135.68) v1(95.25,24.26) v1(95.25,6.99) v1(97.52,0.96) v1(98.15,135.68) v1(98.42,24.26) v1(98.42,6.99) v1(100.97,25.15) v1(100.97,8.26) v1(101.33,0.96) v1(101.96,135.68) v1(103.38,31.75) v1(103.38,30.35) v1(104.14,25.15) v1(104.14,8.26) v1(104.39,30.35) v1(105.14,0.96) v1(105.54,30.35) v1(105.77,135.68) v1(106.05,6.99) v1(106.68,24.26) v1(108.95,0.96) v1(109.58,135.68) v1(109.86,24.26) v1(109.86,5.71) v1(111.67,7.71) v1(112.39,25.15) v1(112.76,0.96) v1(113.39,135.68) v1(116.57,0.96) v1(117.2,135.68) v1(118.87,31.11) v1(120.14,31.11) v1(120.38,0.96) v1(121.16,105.28) v1(121.16,104.27) v1(121.41,31.11) v1(122.28,135.68) v1(124.19,0.96) v1(126.11,25.4) v1(126.11,24.26) v1(126.11,23.11) v1(127.38,25.4) v1(127.38,24.26) v1(127.38,23.11) v1(128,0.96) v1(129.31,134.91) v1(129.31,131.1) v1(129.31,127.29) v1(129.31,123.48) v1(129.31,119.67) v1(129.31,115.86) v1(129.31,112.05) v1(129.31,108.24) v1(129.31,104.43) v1(129.31,100.62) v1(129.31,96.81) v1(129.31,93) v1(129.31,89.19) v1(129.31,85.38) v1(129.31,81.57) v1(129.31,77.76) v1(129.31,73.95) v1(129.31,70.14) v1(129.31,66.33) v1(129.31,62.52) v1(129.31,58.71) v1(129.31,54.9) v1(129.31,51.09) v1(129.31,47.28) v1(129.31,43.47) v1(129.31,39.66) v1(129.31,35.85) v1(129.31,32.04) v1(129.31,28.23) v1(129.31,24.42) v1(129.31,20.61) v1(129.31,16.8) v1(129.31,12.99) v1(129.31,9.18) v1(129.31,5.37) v2(63.75,63.25) v2(64.25,65.25) v2(108.46,83.69) v2(108.46,81.41) v2(113.41,79.88) v2(113.41,78.61) v2(113.41,77.34) v2(114.94,79.88) v2(115.57,77.22)
